# Altium PCB TAUV-Powerboard.PcbDoc (part 1 of 2)
Units mil, origin at the board's own origin, x right, y up, seen from the top; angles counter-clockwise.
Board outline 4762.5 x 3417.5 mil, 4 copper layers (Component Side, Ground Plane, Power Plane, Solder Side), stack 33.234 mil thick; 159 components, 82 nets, 454 pads, 262 vias.
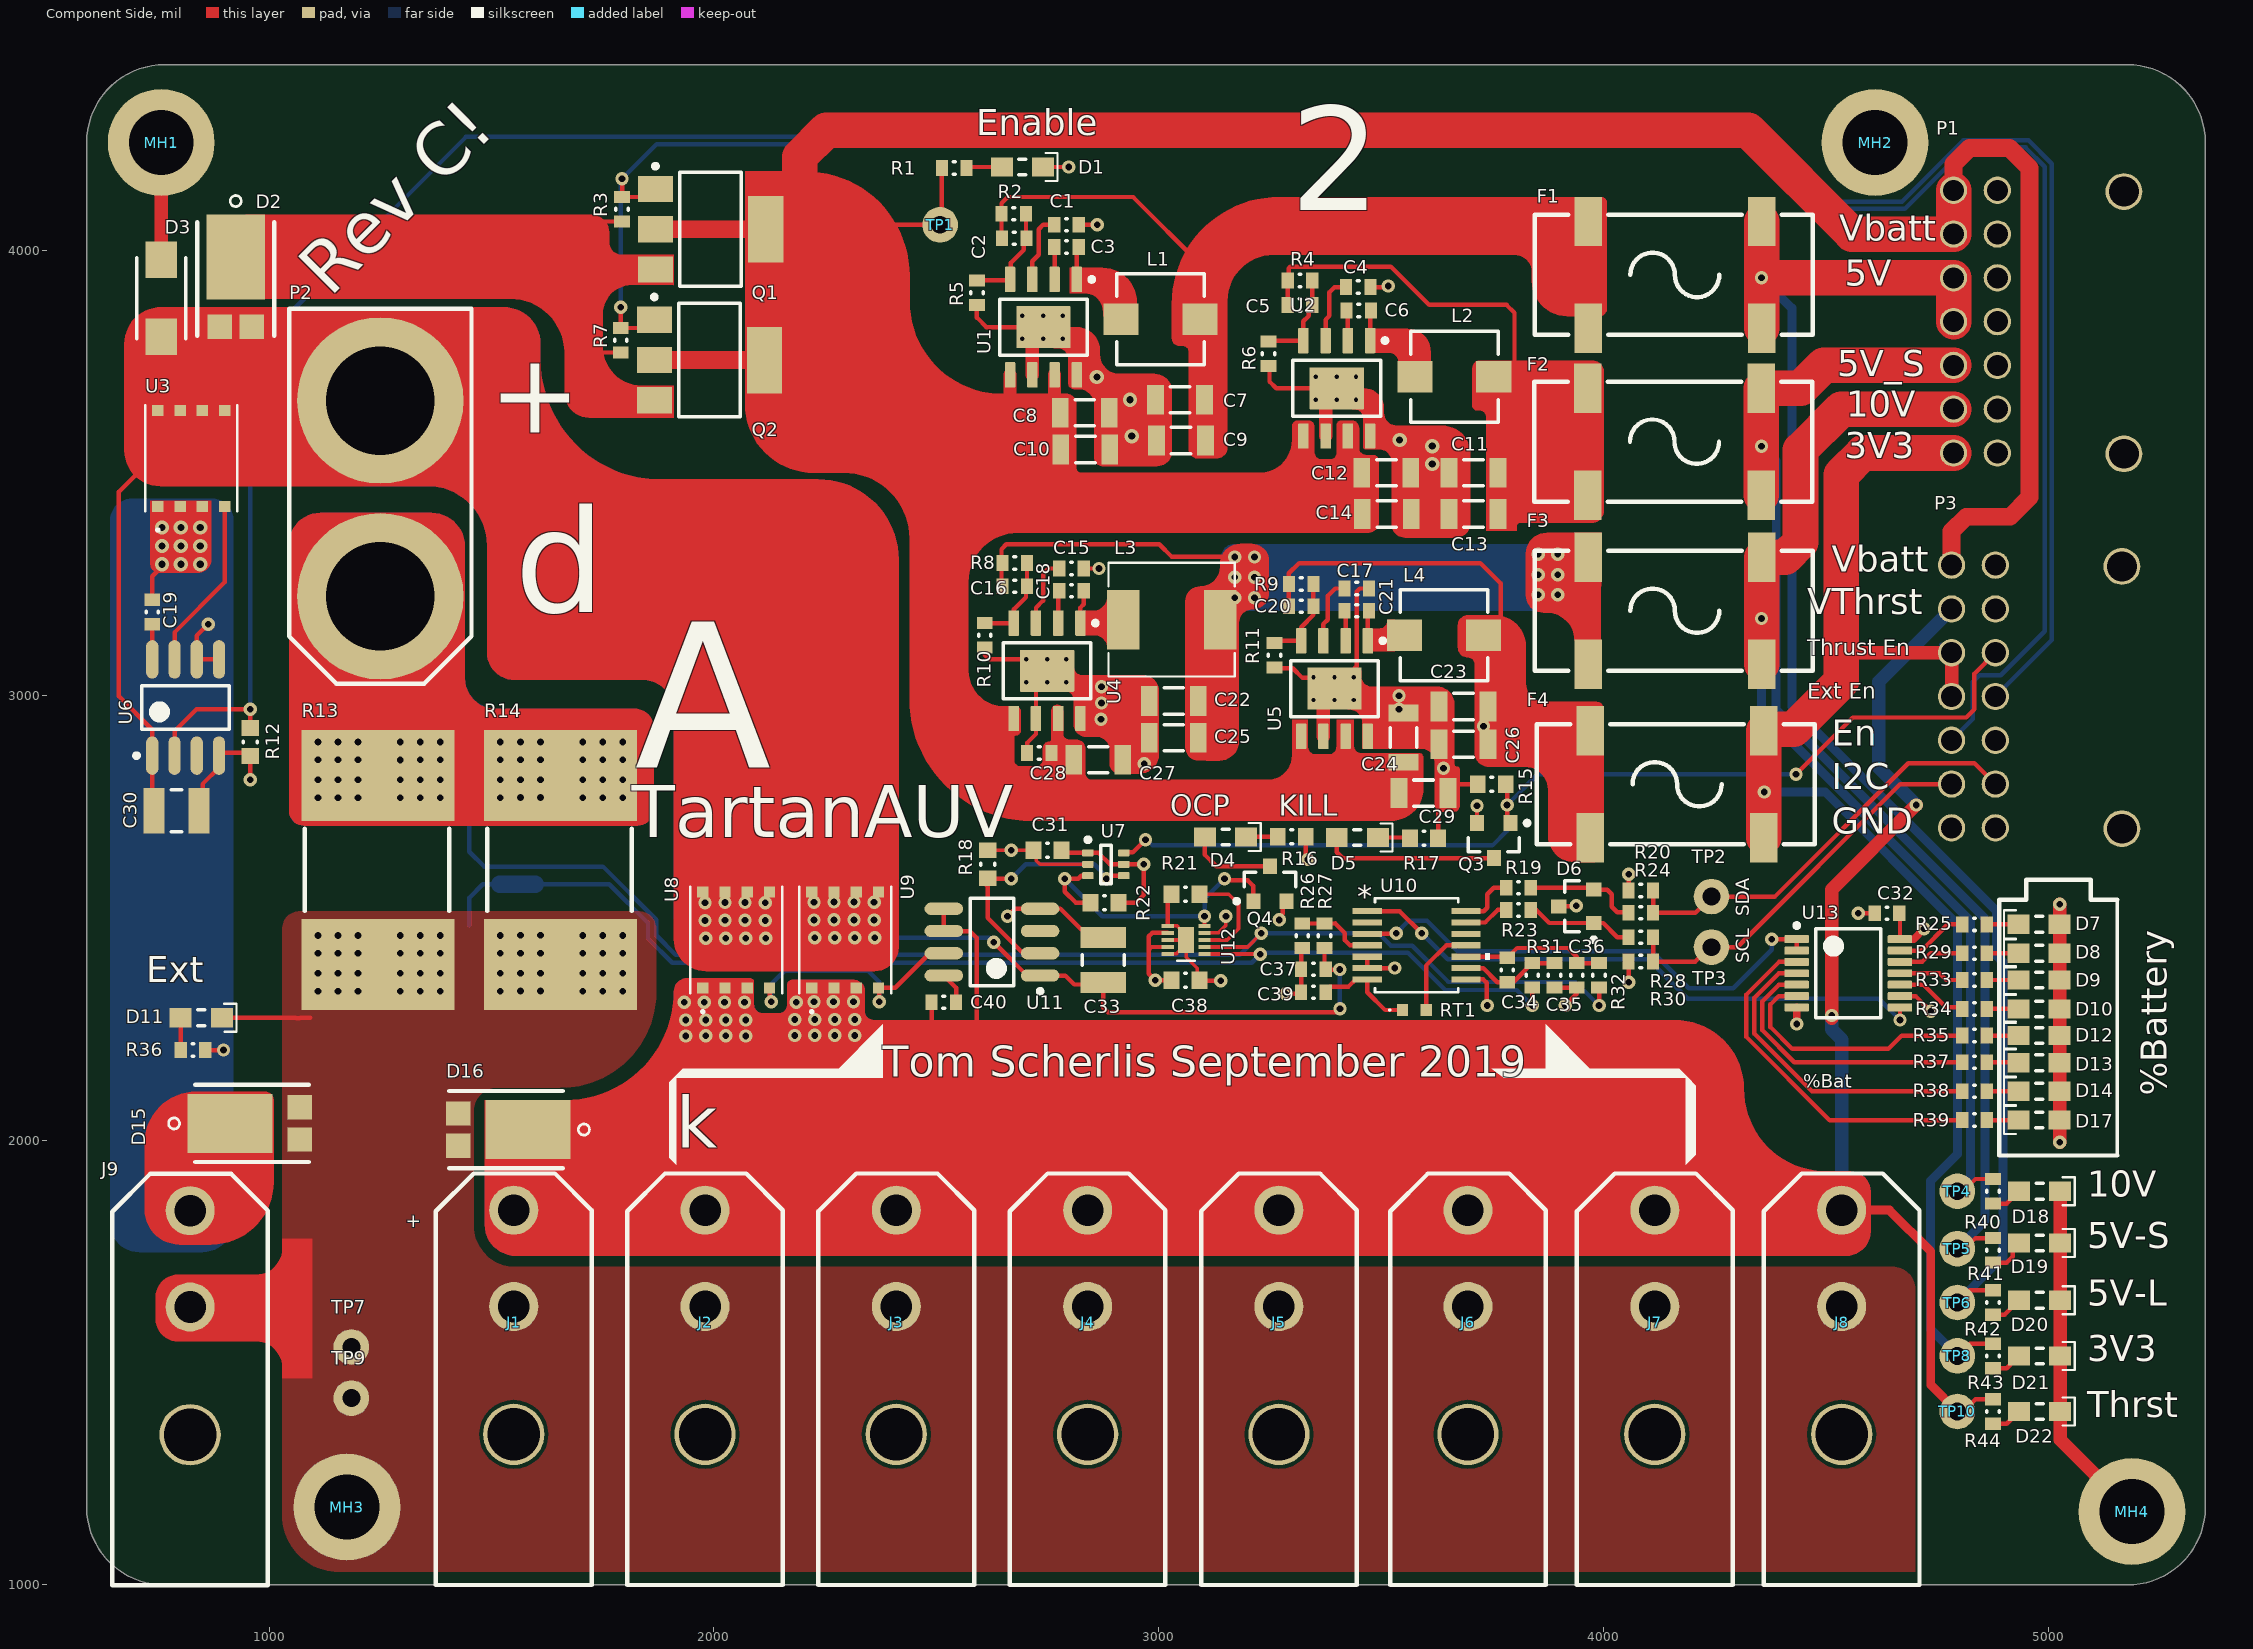
[diagram p0: Component Side view]
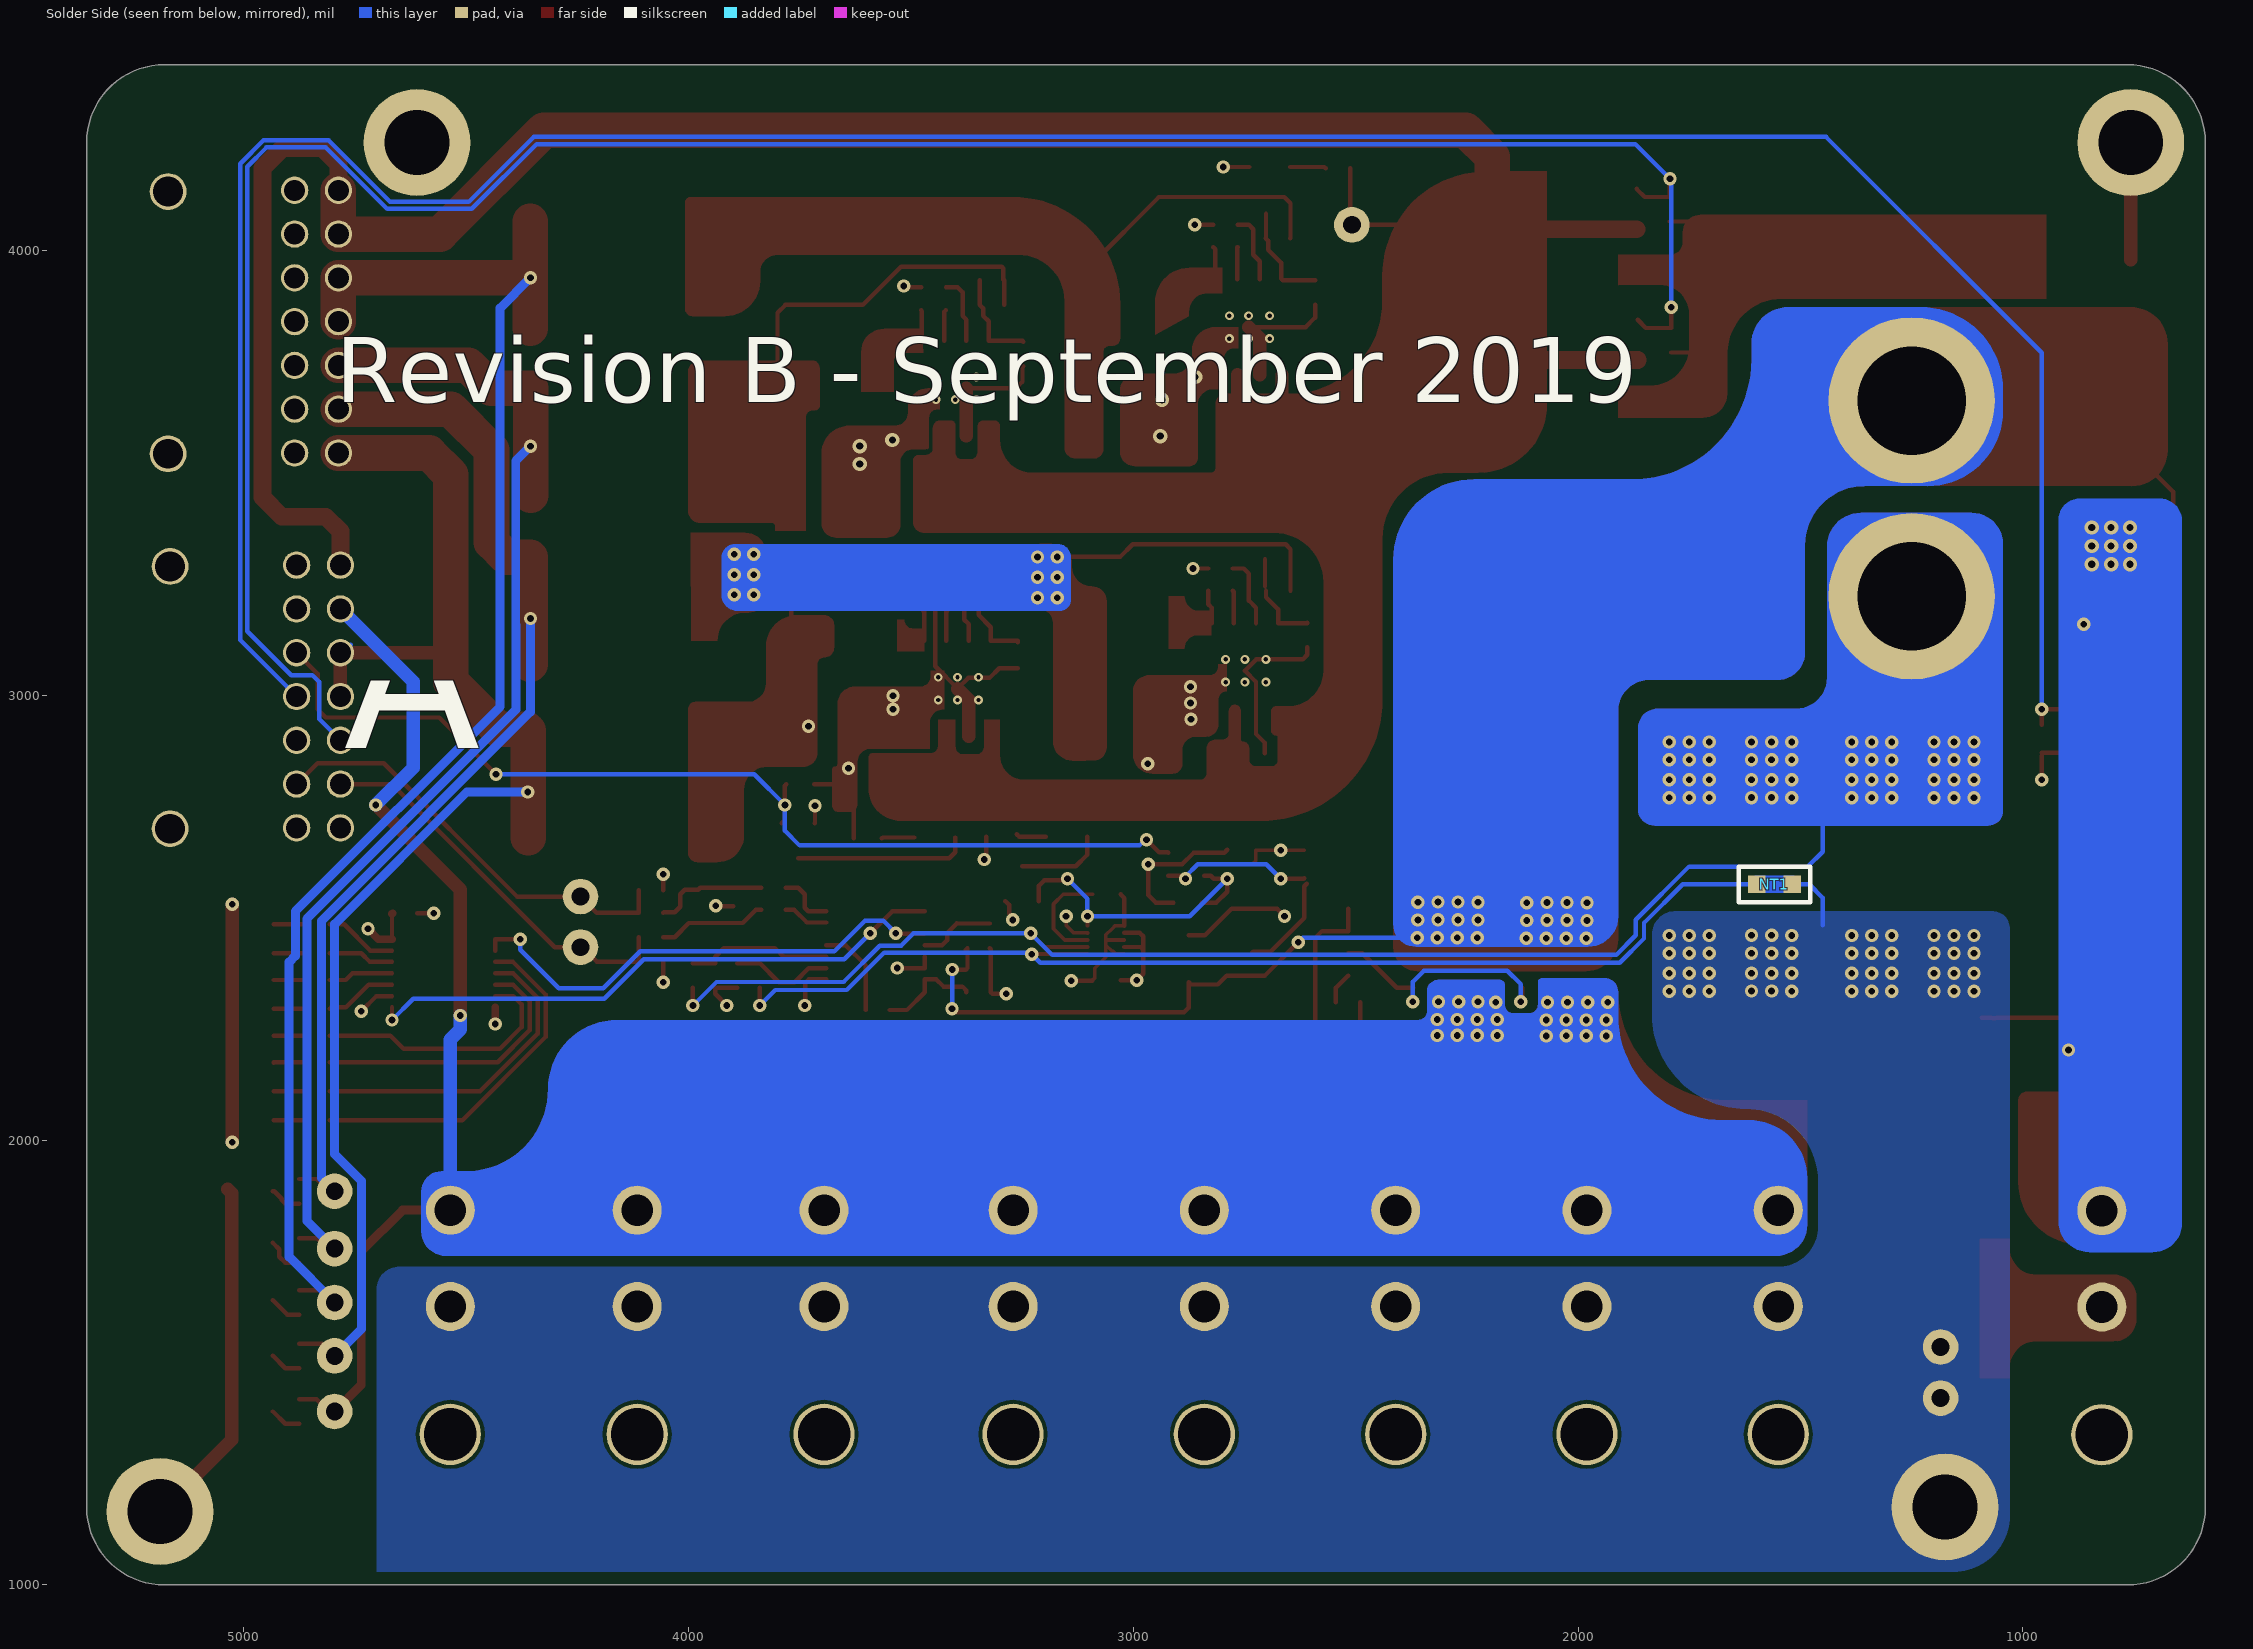
[diagram p1: Solder Side view, seen from below]
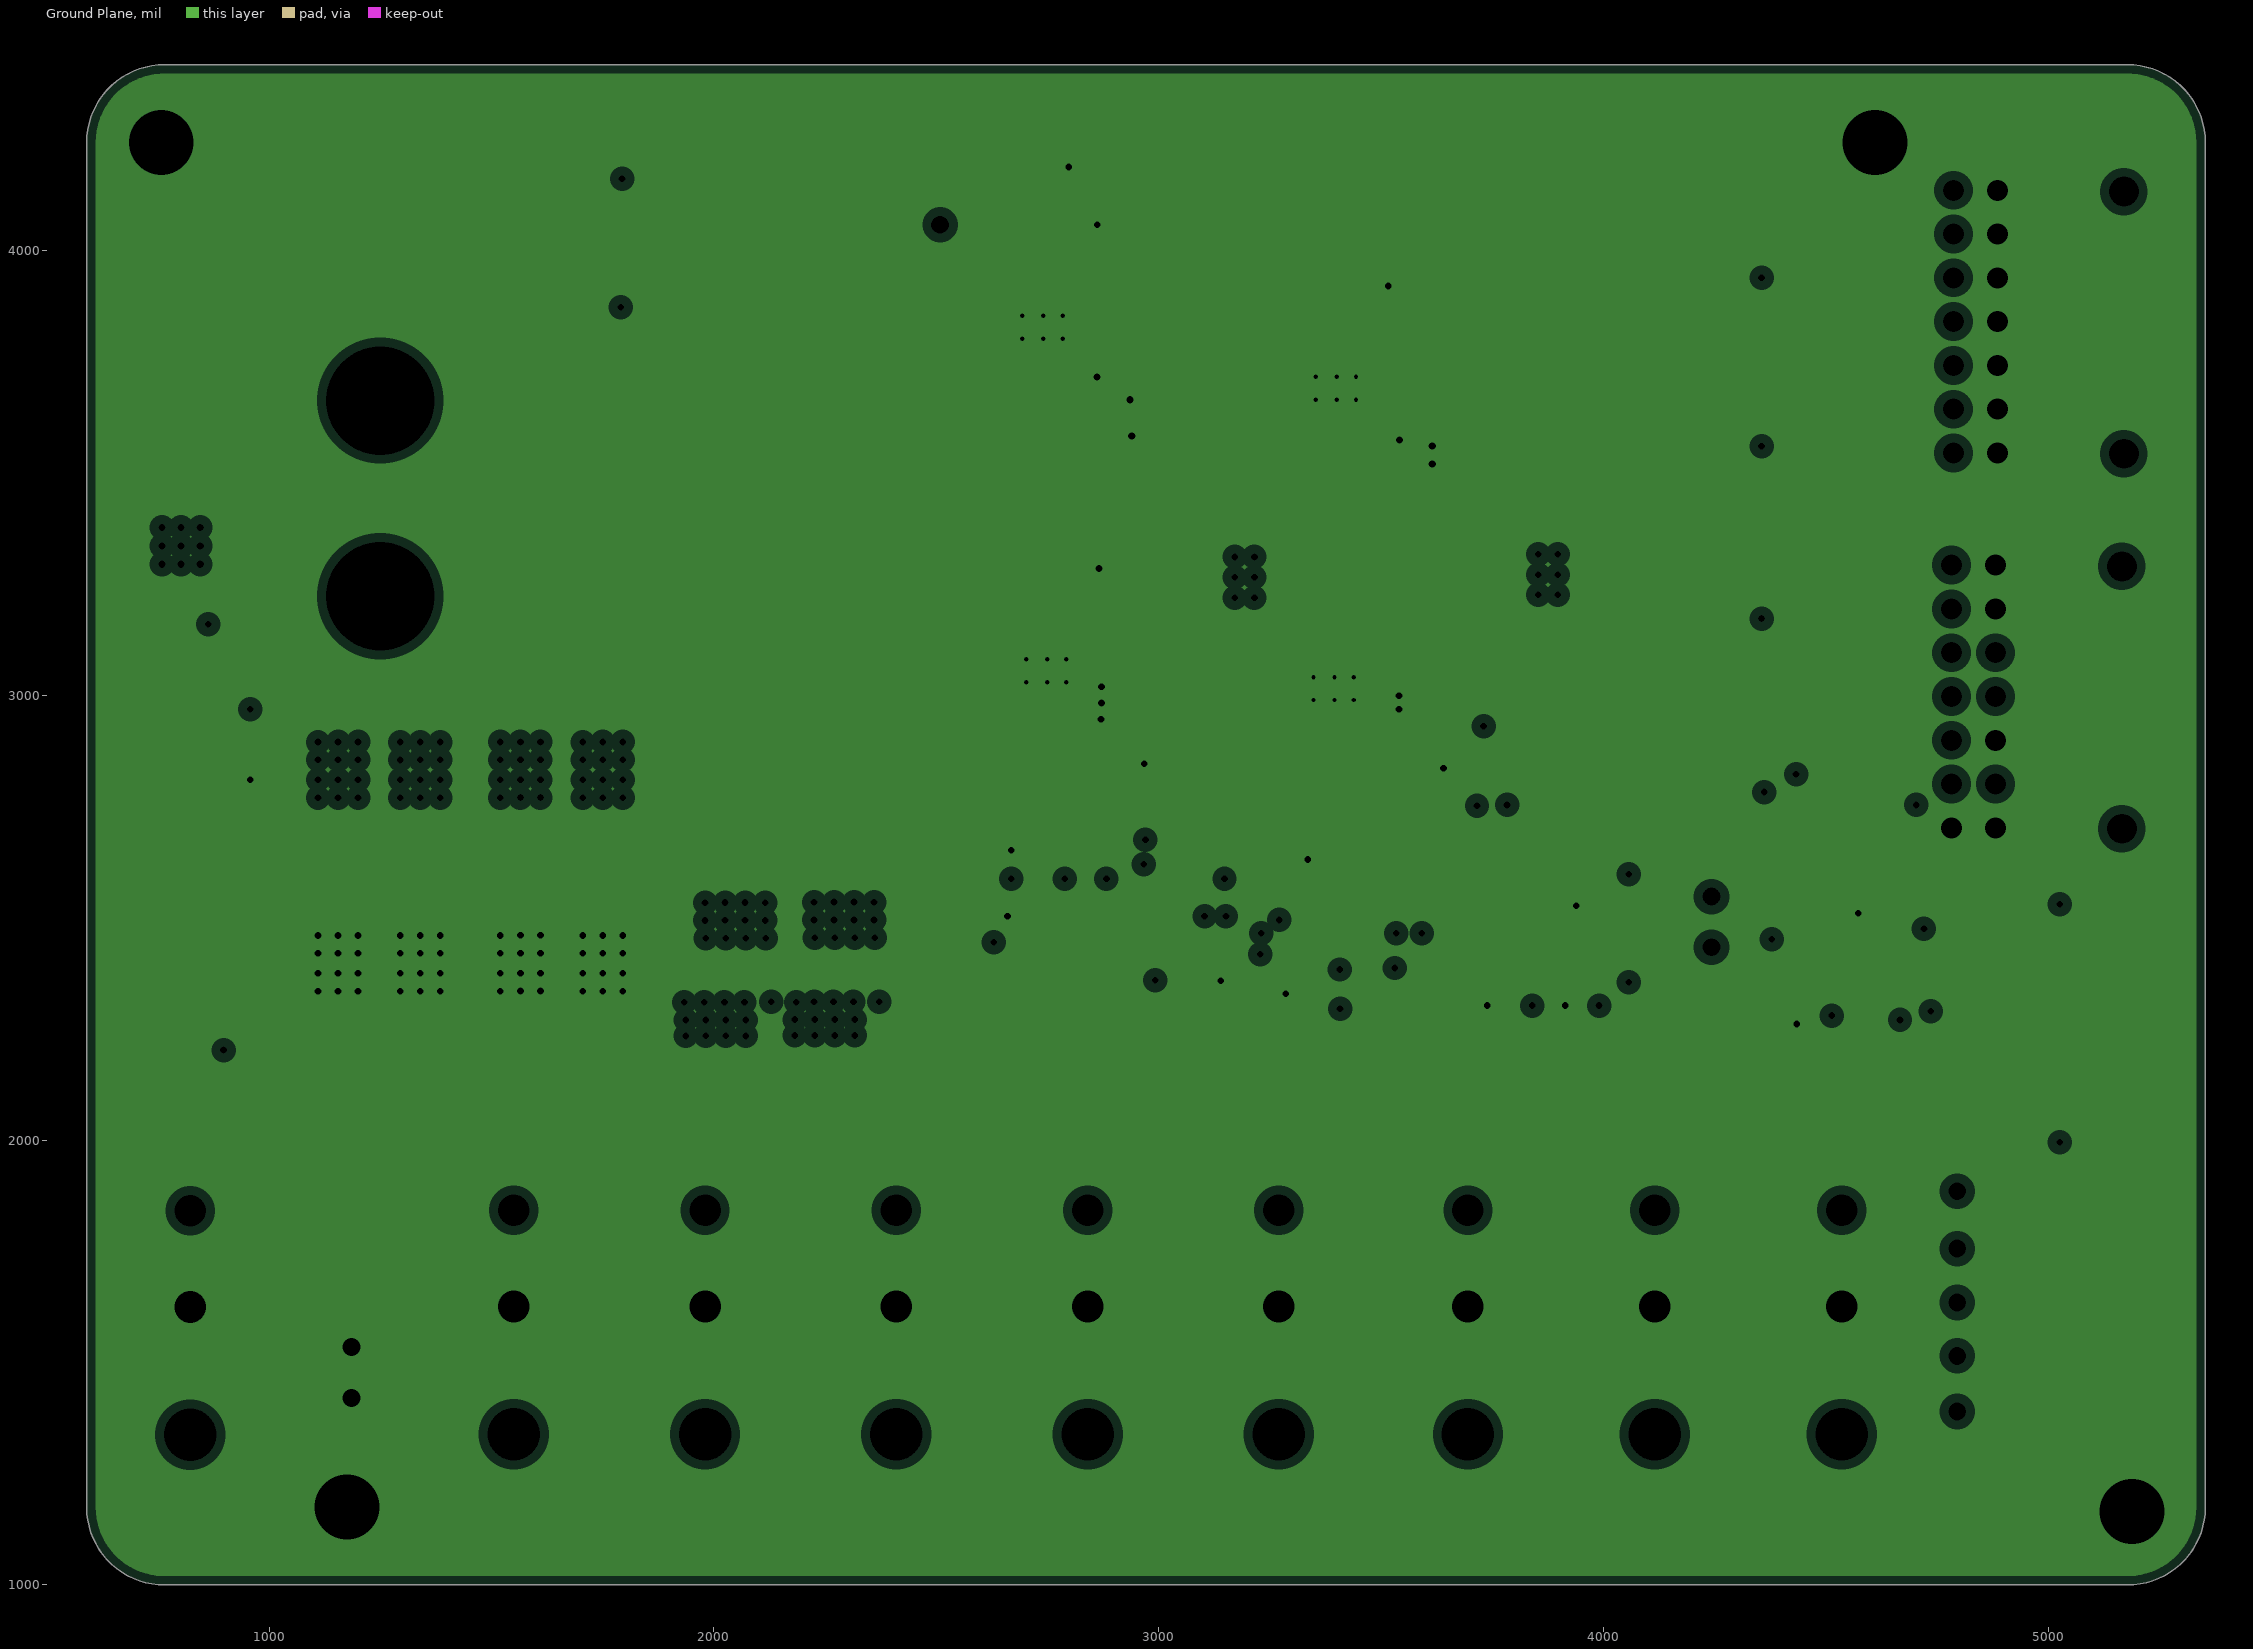
[diagram p2: Ground Plane, clearances drawn from the general rule]
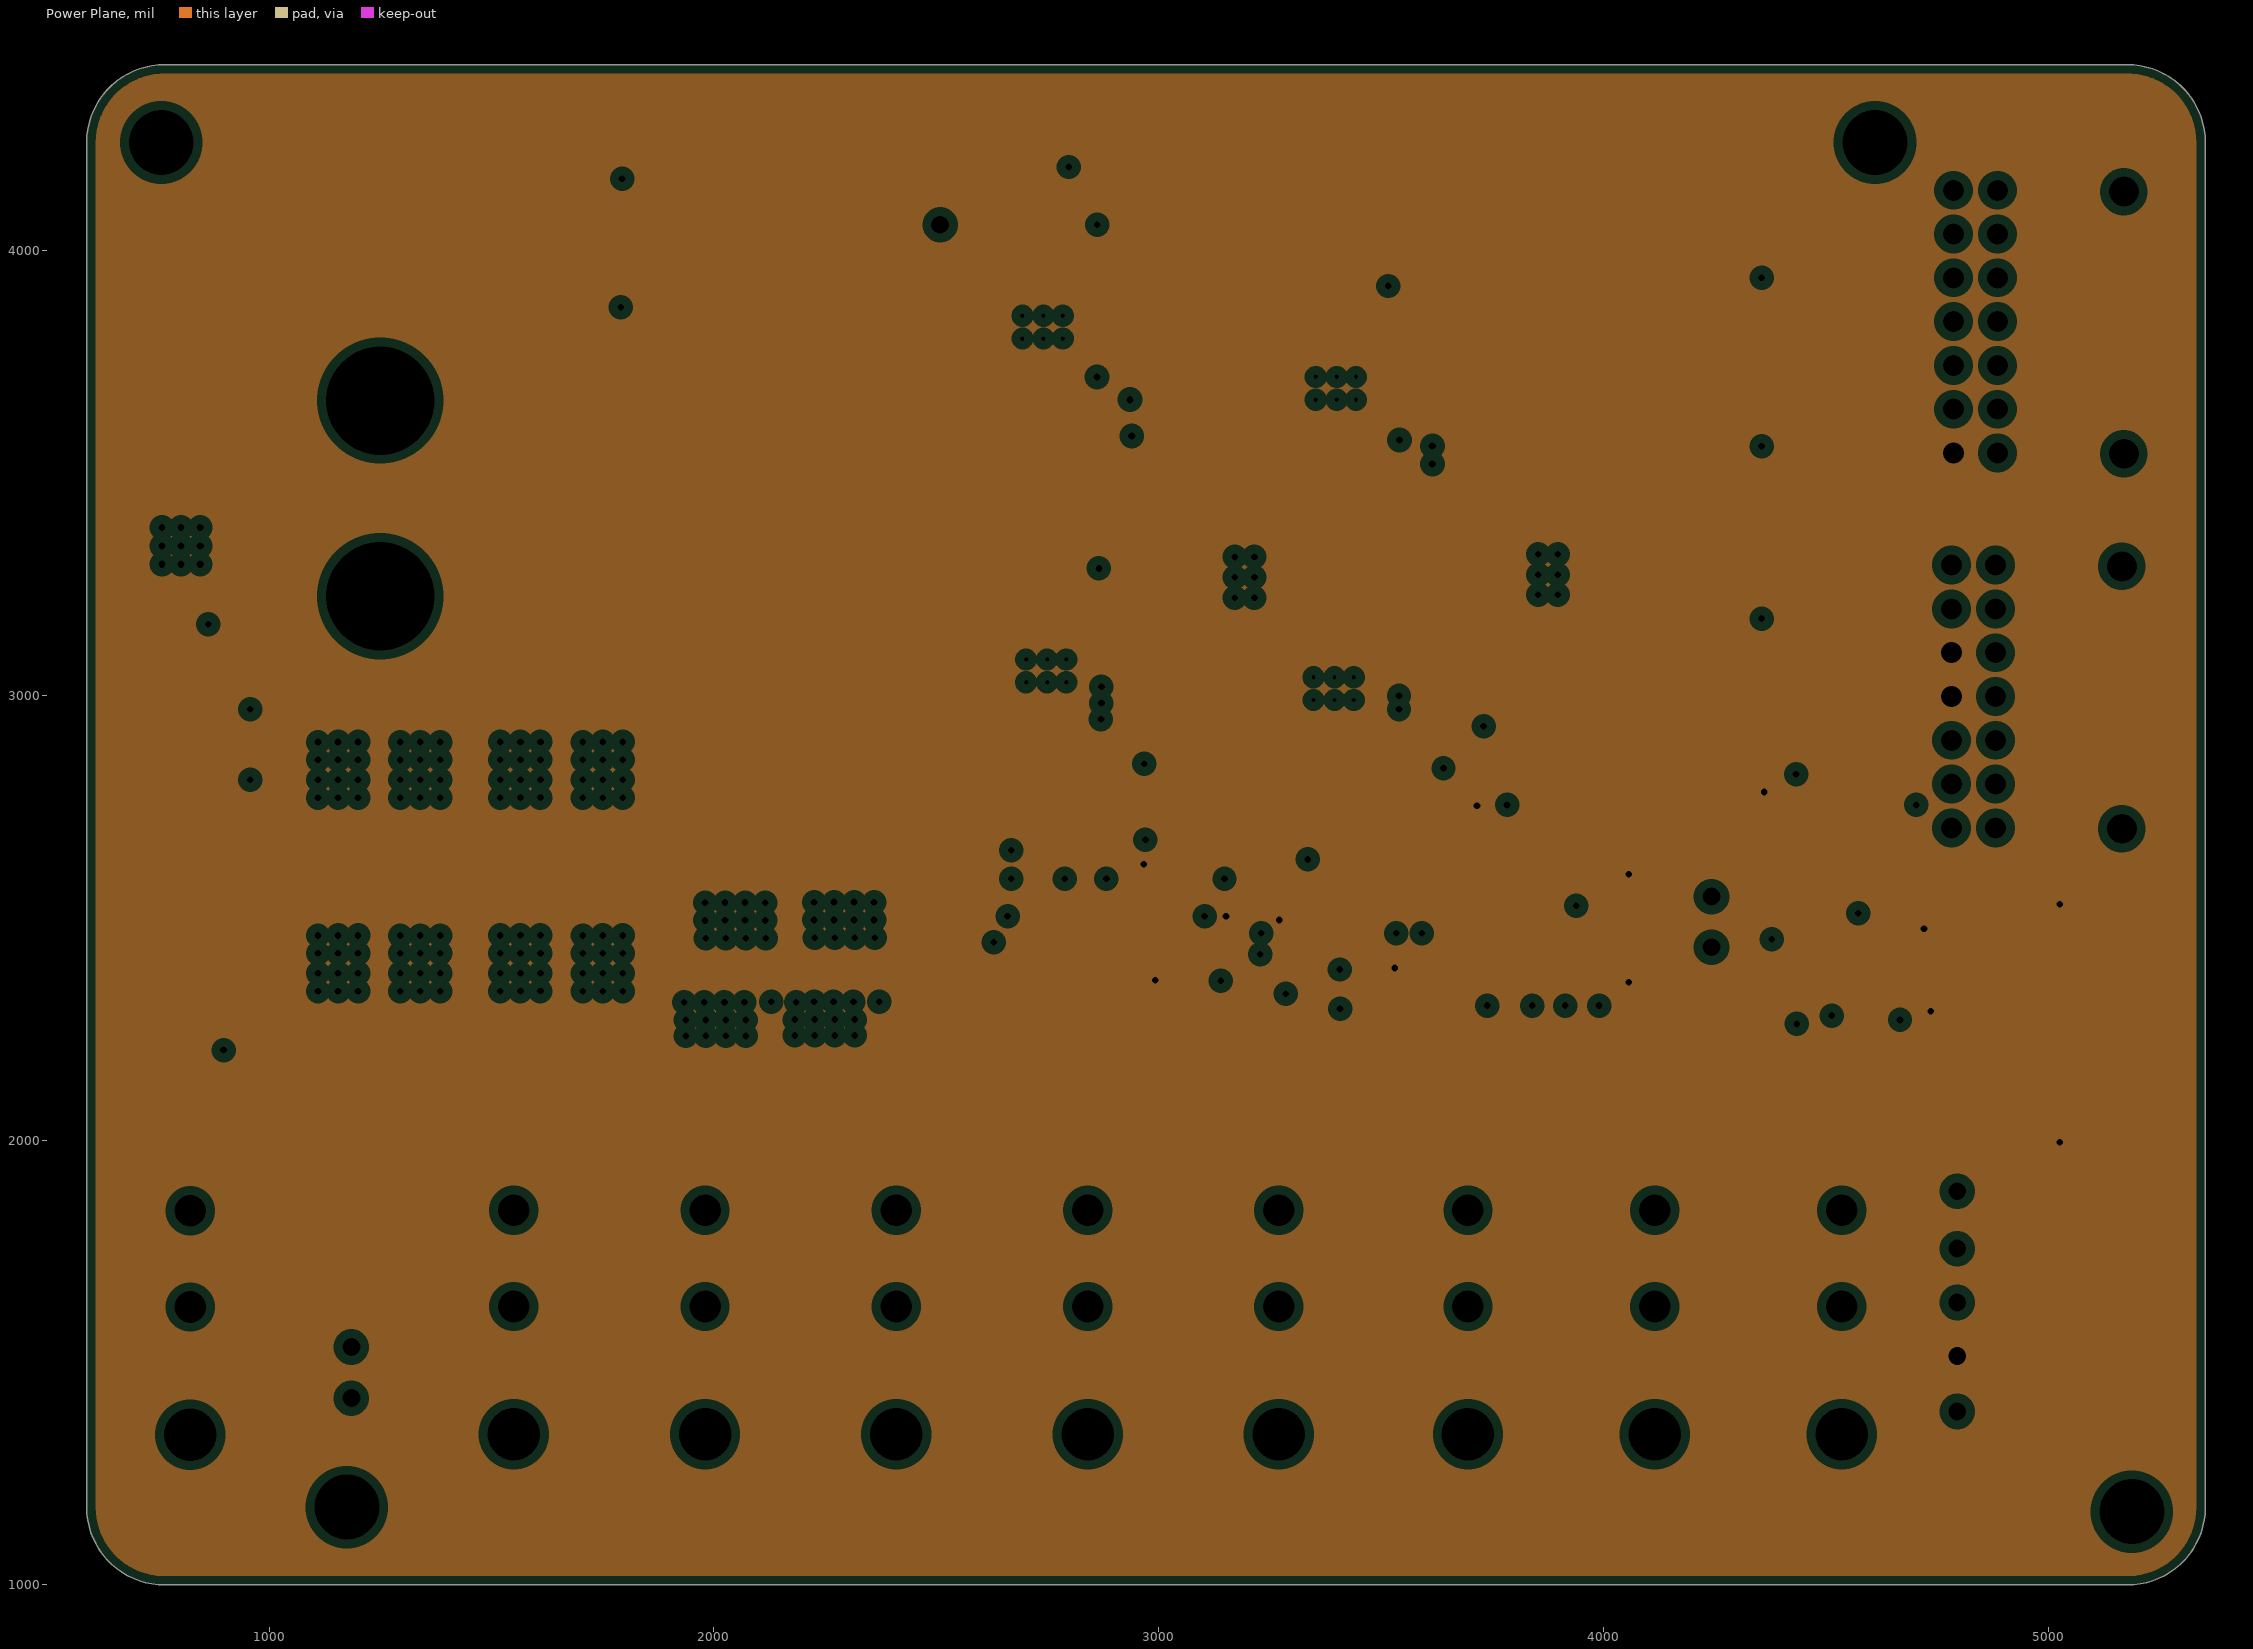
[diagram p3: Power Plane, clearances drawn from the general rule]

## Layer stack, top to bottom
Top Solder: solder mask 0.4, Solder Resist, Dk 3.5
Component Side: signal copper 1.4
Dielectric 1: core 12.6, FR-4, Dk 4.8
Ground Plane: plane copper 1.417, net GND
Dielectric 3: prepreg 5, Dk 4.2
Power Plane: plane copper 1.417, net VCC_3V3
Dielectric 4: core 10, Dk 4.2
Solder Side: signal copper 1.4
Bottom Solder: solder mask 0.4, Solder Resist, Dk 3.5

## Board outline
765,1000 5177.5,1000 ccw(c5177.5,1175) 5352.5,1175 5352.5,4242.5 ccw(c5177.5,4242.5) 5177.5,4417.5 765,4417.5 ccw(c765,4242.5) 590,4242.5 590,1175 ccw(c765,1175)

## Design rules (kind name [scope] priority, off if disabled: settings)
Clearance [All] p1: gap=8 ignorepadtopadclearanceinfootprint=FALSE except(6: Arc-Arc Arc-Track Arc-SMDPad Track-Track Track-SMDPad SMDPad-SMDPad)
Height [All] p1: minheight=0 maxheight=10000 prefheight=500
HoleSize [All] p1: absolutevalues=TRUE maxlimit=400 minlimit=10 maxpercent=80.000 minpercent=20.000
PlaneClearance [All] p1: clearance=20
PlaneConnect [All] p1: planeconnectstyle=Relief reliefexpansion=10 reliefentries=4 reliefconductorwidth=30 reliefairgap=6
PolygonConnect PolygonConnect_1 [InNet('GND')] p1: connectstyle=Direct reliefconductorwidth=50 reliefentries=4 polygonreliefangle="90 Angle" airgapwidth=10
PolygonConnect [All] p2: connectstyle=Relief reliefconductorwidth=10 reliefentries=4 polygonreliefangle="90 Angle" airgapwidth=10
RoutingVias [All] p1: holewidth=15 width=30 viastyle="Through Hole" minholewidth=15 minwidth=30 maxholewidth=28 maxwidth=50
SolderMaskExpansion [All] p1: expansion=4 istentingtop=FALSE
Width [All] p1: maxlimit=100 minlimit=8 preferedwidth=10
26 further rules are at their usual default settings.

## Classes and differential pairs
component class U_External: C19 C30 D15 J9 R12 U3 U6
component class U_Thrusters: *1 *2 *3 *4 *5 *6 *7 *8 C31 C33 C38 C40 D4 D5 D16 J1 J2 J3 J4 J5 J6 J7 J8 Q3 Q4 R15 R16 R17 R18 R21 R22 U7 U8 U9 U11 U12
component class U_Regulators: C1 C2 C3 C4 C5 C6 C7 C8 C9 C10 C11 C12 C13 C14 C15 C16 C17 C18 C20 C21 C22 C23 C24 C25 C26 C27 C28 C29 F1 F2 F3 F4 L1 L2 L3 L4 R2 R4 R5 R6 R8 R9 R10 R11 U1 U2 U4 U5
component class U_Power: D2 D3 NT1 P2 Q1 Q2 R3 R7 R13 R14
component class U_Interface: D1 D11 D18 D19 D20 D21 D22 MH1 MH2 MH3 MH4 P1 P3 R1 R36 R40 R41 R42 R43 R44 TP1 TP2 TP3 TP4 TP5 TP6 TP7 TP8 TP9 TP10
component class U_BMS: C32 C34 C35 C36 C37 C39 D6 D7 D8 D9 D10 D12 D13 D14 D17 R19 R20 R23 R24 R25 R26 R27 R28 R29 R30 R31 R32 R33 R34 R35 R37 R38 R39 RT1 U10 U13

## Components (designator, comment, footprint, x,y, rotation, side; value= is the part's Value field where it differs from the comment)
C1 "1uF 25V" CAPC0603(1608)100_L 2792.5,4057.5 r180 top value=1uF
C2 "30pF" CAPC0603(1608)100_L 2674.94,4027.5 r180 top
C3 "100nF" CAPC0603(1608)100_L 2792.5,4007.5 r180 top
C4 "1uF 25V" CAPC0603(1608)100_L 3448.42,3917.5 r180 top value=1uF
C5 "30pF" CAPC0603(1608)100_L 3317.5,3877.44 r180 top
C6 "100nF" CAPC0603(1608)100_L 3449.36,3865 r180 top
C7 "4.7uF" CAPC1206(3216)190_L 3047.72,3664.41 r0 top
C8 "4.7uF" CAPC1206(3216)190_L 2833.44,3635 r180 top
C9 "47uF" CAPC1206(3216)190_L 3050,3572.5 r0 top
C10 "4.7uF" CAPC1206(3216)190_L 2835,3552.5 r180 top
C11 "47uF" CAPC1206(3216)190_L 3707.47,3500 r0 top
C12 "4.7uF" CAPC1206(3216)190_L 3511.63,3500 r180 top
C13 "4.7uF" CAPC1206(3216)190_L 3707.47,3407.5 r0 top
C14 "4.7uF" CAPC1206(3216)190_L 3512.38,3407.5 r180 top
C15 "1uF 25V" CAPC0603(1608)100_L 2803.94,3285 r180 top value=1uF
C16 "12pF" CAPC0603(1608)100_L 2676.22,3245.21 r180 top
C17 "1uF 25V" CAPC0603(1608)100_L 3445,3240 r180 top value=1uF
C18 "680nF" CAPC0603(1608)100_L 2803.94,3235 r180 top
C19 "10nF" CAPC0603(1608)100_L 737.5,3187.44 r90 top
C20 "75pF" CAPC0603(1608)100_L 3320,3200 r180 top
C21 "100nF" CAPC0603(1608)100_L 3445,3190 r180 top
C22 "4.7uF" CAPC1206(3216)190_L 3033.73,2986.98 r0 top
C23 "4.7uF" CAPC1206(3216)190_L 3685,2975 r0 top
C24 "4.7uF" CAPC1206(3216)190_L 3550,2904.88 r270 top
C25 "CAP 22uF 16V 1206(3216)" CAPC1206(3216)190_L 3033.73,2904.48 r0 top value=22uF
C26 "47uF" CAPC1206(3216)190_L 3684.88,2890 r0 top
C27 "10uF" CAPC1206(3216)190_L 2863.94,2855 r180 top
C28 "100nF" CAPC0603(1608)100_L 2731.38,2870 r0 top
C29 "4.7uF" CAPC1206(3216)190_L 3595,2780 r180 top
C30 "CAP 22uF 25V 1210(3225)" CAPC1210(3225)220_L 791.84,2740 r180 top value=22uF
C31 "100nF" CAPC0603(1608)100_N 2749.75,2651.57 r0 top
C32 "100nF" CAPC0603(1608)100_L 4637.02,2510 r0 top
C33 "CAP 22uF 25V 1210(3225)" CAPC1210(3225)220_L 2875,2405 r270 top value=22uF
C34 "100nF" CAPC0603(1608)100_L 3783.51,2382.5 r270 top
C35 "100nF" CAPC0603(1608)100_L 3889.73,2370.53 r90 top
C36 "100nF" CAPC0603(1608)100_L 3939.73,2370.53 r90 top
C37 "1uF 25V" CAPC0603(1608)100_L 3347.5,2384.38 r0 top value=1uF
C38 "100nF" CAPC0603(1608)100_N 3060,2359.24 r180 top
C39 "1uF 25V" CAPC0603(1608)100_L 3347.5,2332.41 r0 top value=1uF
C40 "10nF" CAPC0603(1608)100_L 2516.73,2310 r180 top
D1 "LED GREEN" LED_0805 2693.38,4187.5 r180 top
D2 "SBRT15U50SP5-13" SBRT15U50SP5-13 925,3985 r0 top
D3 "SMAJ30CA" LFUS-DO-214AC-A-2_V 757.5,3892.5 r90 top
D4 "LED RED" LED_0805 3150.02,2681.58 r180 top
D5 "LED RED" LED_0805 3446.37,2680.23 r180 top
D6 "MMBZ5V6ALT1G" ONSC-SOT-23-3-318-08_V 3938.51,2525.5 r180 top
D7 "LED GREEN" LED_0805 4978.74,2485 r0 top
D8 "LED GREEN" LED_0805 4978.74,2420 r0 top
D9 "LED GREEN" LED_0805 4978.74,2360 r0 top
D10 "LED YELLOW" LED_0805 4978.74,2295 r0 top
D11 "LED GREEN" LED_0805 847.5,2275 r180 top
D12 "LED YELLOW" LED_0805 4978.74,2235 r0 top
D13 "LED YELLOW" LED_0805 4978.74,2174.02 r0 top
D14 "LED RED" LED_0805 4978.74,2110 r0 top
D15 "SBRT15U50SP5-13" SBRT15U50SP5-13 912.5,2037.5 r90 top
D16 "SBRT15U50SP5-13" SBRT15U50SP5-13 1581.77,2023.78 r270 top
D17 "LED RED" LED_0805 4978.74,2045 r0 top
D18 "LED GREEN" LED_0805 4980,1885 r180 top
D19 "LED GREEN" LED_0805 4980,1768.95 r180 top
D20 "LED GREEN" LED_0805 4980,1640 r180 top
D21 "LED GREEN" LED_0805 4980,1515 r180 top
D22 "LED GREEN" LED_0805 4980,1390 r180 top
F1 "Fuse Holder 3588" "Fuse Holder 3588" 4160,3945 r0 top
F2 "Fuse Holder 3588" "Fuse Holder 3588" 4159.25,3570 r0 top
F3 "Fuse Holder 3588" "Fuse Holder 3588" 4160,3190 r0 top
F4 "Fuse Holder 3588" "Fuse Holder 3588" 4165,2800 r0 top
J1 "2-pin megafit" "2-PIN MEGAFIT RA" 1550,1000 r0 top
J2 "2-pin megafit" "2-PIN MEGAFIT RA" 1980,1000 r0 top
J3 "2-pin megafit" "2-PIN MEGAFIT RA" 2410,1000 r0 top
J4 "2-pin megafit" "2-PIN MEGAFIT RA" 2840,1000 r0 top
J5 "2-pin megafit" "2-PIN MEGAFIT RA" 3270,1000 r0 top
J6 "2-pin megafit" "2-PIN MEGAFIT RA" 3695,1000 r0 top
J7 "2-pin megafit" "2-PIN MEGAFIT RA" 4115,1000 r0 top
J8 "2-pin megafit" "2-PIN MEGAFIT RA" 4535,1000 r0 top
J9 "2-pin megafit" "2-PIN MEGAFIT RA" 822.5,998.92 r0 top
L1 "SRP6540-8R2M" "BOURNS SRP5030T" 3003.91,3845.59 r0 top
L2 "SRP6540-8R2M" "BOURNS SRP5030T" 3664.37,3715.59 r0 top
L3 "SRP6540-100M" IND_SRP6540-100M 3028.94,3170 r0 top
L4 "6.8uH" "BOURNS SRP5030T" 3641.42,3135 r0 top
MH1 "#4-40" "MOUNTING HOLE #4-40" 757.5,4242.5 r0 top
MH2 "#4-40" "MOUNTING HOLE #4-40" 4610,4242.5 r0 top
MH3 "#4-40" "MOUNTING HOLE #4-40" 1175,1175 r0 top
MH4 "#4-40" "MOUNTING HOLE #4-40" 5187.5,1165 r0 top
NT1 "Net Tie" Net_Tie_80mil 1518.56,2575 r0 bottom net-tie
P1 "14-Pin 2-Row Nano-Fit Right Angle" "MOLEX NANO-FIT 2X7 - Right Angle" 4885,3544.64 r90 top
P2 "XT90" XT90 1250,3222.5 r90 top
P3 "14-Pin 2-Row Nano-Fit Right Angle" "MOLEX NANO-FIT 2X7 - Right Angle" 4880.55,2701.97 r90 top
Q1 "NVF6P02T3G" ONSC-SOT-223-4-318E-04_V 1992.5,4047.66 r0 top
Q2 "NVF6P02T3G" ONSC-SOT-223-4-318E-04_V 1990,3753.49 r0 top
Q3 "NVTR01P02LT1G" ONSC-SOT-23-3-318-08_V 3753.11,2673.29 r270 top
Q4 "NVTR01P02LT1G" ONSC-SOT-23-3-318-08_V 3249.87,2576.5 r90 top
R1 "1K2" RESC0603(1608)_L 2540,4185 r180 top value="1200.00 Ohm"
R2 "88K7 1%" RESC0603(1608)_L 2673.94,4082.5 r180 top value="88700.00 Ohm"
R3 "4K7" RESC0603(1608)_L 1793.42,4092.5 r270 top value="4700.00 Ohm"
R4 "88K7 1%" RESC0603(1608)_L 3317.5,3932.56 r180 top value="88700.00 Ohm"
R5 "22K1 1%" RESC0603(1608)_L 2591.13,3905 r90 top value="22100.00 Ohm"
R6 "22K1 1%" RESC0603(1608)_L 3246.76,3767.56 r90 top value="22100.00 Ohm"
R7 "4K7" RESC0603(1608)_L 1790.57,3798.04 r270 top value="4700.00 Ohm"
R8 "200K 1%" RESC0603(1608)_L 2676.22,3297.49 r180 top value="200000.00 Ohm"
R9 "51K 1%" RESC0603(1608)_L 3320,3250 r180 top value="51000.00 Ohm"
R10 "22K1 1%" RESC0603(1608)_L 2608.75,3135 r90 top value="22100.00 Ohm"
R11 "22K1 1%" RESC0603(1608)_L 3260,3090 r90 top value="22100.00 Ohm"
R12 "10K" RESC0603(1608)_N 957.5,2895 r270 top value="10000.00 Ohm"
R13 "WSLP59312 2mR 8W" WSLP59312L000FEA 1245,2820 r270 top
R14 "WSLP59312 2mR 8W" WSLP59312L000FEA 1655,2820 r270 top
R15 "10K" RESC0603(1608)_N 3748.33,2800 r180 top value="10000.00 Ohm"
R16 "100R" RESC0603(1608)_N 3298.93,2681.58 r0 top value="100.00 Ohm"
R17 "100R" RESC0603(1608)_N 3596.43,2678.63 r0 top value="100.00 Ohm"
R18 "10K" RESC0603(1608)_N 2615.5,2620.07 r90 top value="10000.00 Ohm"
R19 "100R" RESC0603(1608)_L 3808.51,2567.5 r0 top value="100.00 Ohm"
R20 "4K7" RESC0603(1608)_L 4083.51,2561.28 r180 top value="4700.00 Ohm"
R21 "7K5 1%" RESC0603(1608)_N 3060,2552.5 r180 top value="7500.00 Ohm"
R22 "10K" RESC0603(1608)_N 2877.94,2533.95 r0 top value="10000.00 Ohm"
R23 "100R" RESC0603(1608)_L 3808.51,2517.5 r0 top value="100.00 Ohm"
R24 "100R" RESC0603(1608)_L 4083.51,2511.28 r0 top value="100.00 Ohm"
R25 "100R" RESC0603(1608)_L 4833.74,2485 r0 top value="100.00 Ohm"
R26 "16K5" RESC0603(1608)_L 3322.5,2459.38 r90 top value="16500.00 Ohm"
R27 "294K" RESC0603(1608)_L 3372.5,2459.38 r270 top value="294000.00 Ohm"
R28 "100R" RESC0603(1608)_L 4083.51,2456.28 r0 top value="100.00 Ohm"
R29 "100R" RESC0603(1608)_L 4833.74,2420 r0 top value="100.00 Ohm"
R30 "4K7" RESC0603(1608)_L 4083.51,2401.28 r180 top value="4700.00 Ohm"
R31 "100R 1%" RESC0603(1608)_L 3839.73,2370.53 r90 top value="100.00 Ohm"
R32 "100R 1%" RESC0603(1608)_L 3989.73,2370.53 r90 top value="100.00 Ohm"
R33 "100R" RESC0603(1608)_L 4833.74,2360 r0 top value="100.00 Ohm"
R34 "100R" RESC0603(1608)_L 4833.74,2295 r0 top value="100.00 Ohm"
R35 "100R" RESC0603(1608)_L 4833.74,2235 r0 top value="100.00 Ohm"
R36 "1K2" RESC0603(1608)_L 828.75,2202.5 r0 top value="1200.00 Ohm"
R37 "100R" RESC0603(1608)_L 4833.74,2175 r0 top value="100.00 Ohm"
R38 "100R" RESC0603(1608)_L 4833.74,2110 r0 top value="100.00 Ohm"
R39 "100R" RESC0603(1608)_L 4833.74,2045 r0 top value="100.00 Ohm"
R40 "470R" RESC0603(1608)_L 4875,1885 r90 top value="470.00 Ohm"
R41 "220R" RESC0603(1608)_L 4875,1752.28 r90 top value="220.00 Ohm"
R42 "220R" RESC0603(1608)_L 4875,1635 r90 top value="220.00 Ohm"
R43 "100R" RESC0603(1608)_L 4875,1515 r90 top value="100.00 Ohm"
R44 "1K2" RESC0603(1608)_L 4875,1390 r90 top value="1200.00 Ohm"
RT1 "NCP18XH103F03RB" MURA-NCP18XH103F03RB-2_V 3574.31,2292.5 r0 top
TP1 "Test Point Loop" "Test Point Loop - Black" 2508.5,4057.5 r270 top
TP2 "Test Point Loop" "Test Point Loop - Black" 4242.5,2547.5 r0 top
TP3 "Test Point Loop" "Test Point Loop - Black" 4242.5,2433.78 r0 top
TP4 "Test Point Loop" "Test Point Loop - Black" 4795,1885 r0 top
TP5 "Test Point Loop" "Test Point Loop - Black" 4795,1756.11 r0 top
TP6 "Test Point Loop" "Test Point Loop - Black" 4795,1635 r0 top
TP7 "Test Point Loop" "Test Point Loop - Black" 1185,1535 r90 top
TP8 "Test Point Loop" "Test Point Loop - Black" 4795,1515 r0 top
TP9 "Test Point Loop" "Test Point Loop - Black" 1185,1420 r90 top
TP10 "Test Point Loop" "Test Point Loop - Black" 4795,1390 r0 top
U1 "LMR23630-Q1" DDA0008E_N 2740.63,3827.5 r270 top
U2 "LMR23630-Q1" DDA0008E_N 3400,3690 r270 top
U3 "Part Number: CSD18563Q5A" DQJ8 825,3532.5 r90 top value=Value
U4 "LMR23630-Q1" DDA0008E_N 2748.94,3055 r270 top
U5 "LMR23630-Q1" DDA0008E_N 3395,3015 r270 top
U6 "MIC5021YM" MICL-SOICN-8LD-PL-1_V 812.5,2972.5 r90 top
U7 "SN74LVC1G97QDCKRQ1" DCK0006A_L 2881.02,2620.07 r0 top
U8 "Part Number: CSD18563Q5A" DQJ8 2050,2450 r90 top value=Value
U9 "Part Number: CSD18563Q5A" DQJ8 2295,2450 r90 top value=Value
U10 "BQ34Z100PWR-G1" PW14 3579.51,2438 r0 top value=Value
U11 "MIC5021YM" MICL-SOICN-8LD-PL-1_V 2625,2445 r180 top
U12 "Part Number: INA300AIDSQT" DSQ10_P9X1P5 3061.48,2449.91 r180 top value=Value
U13 "SN74HC164PW" PW0014A_N 4550,2375 r0 top

## Footprints (in the part's own frame and the unit in brackets; to place one, negate y for a bottom-side part, rotate by r counter-clockwise, add the part's x,y. Pads: shape width x height; smd on the part's side, far side on the other; paste and mask are expansions set on the pad)
"2-PIN MEGAFIT RA" [mm]
  round 2.8 hole 1.8: 1(0,15.9) 2(0,21.4)
  round 3.5 hole 3: ""(0,8.6)
  silkscreen extent -4.44,0 4.44,23.49, body extent -4.16,-24.98 4.19,21.9, height 16.75
"BOURNS SRP5030T" [mm] "Precision Wire Wound Inductor, 2-Leads, Body 5.70x5.20mm, IPC Medium Density"
  rect 2x1.8 smd: 1(-2.25,0) 2(2.25,0)
  silkscreen extent -2.5,-2.6 2.5,2.6, body extent -2.85,-2.6 2.85,2.6, height 3
CAPC0603(1608)100_L [mm] "Chip Capacitor, Body 1.6x0.8mm, Height 1.0mm, IPC High Density"
  rect 0.7x0.9 smd: 1(-0.7,0) 2(0.7,0)
  silkscreen extent -0.05,-0.35 0.05,0.35, body extent -0.87,-0.47 0.88,0.48, height 1
CAPC0603(1608)100_N [mm] "Chip Capacitor, Body 1.6x0.8mm, Height 1.0mm, IPC Medium Density"
  rect 0.9x1 smd: 1(-0.8,0) 2(0.8,0)
  silkscreen extent -0.05,-0.4 0.05,0.4, body extent -0.87,-0.48 0.88,0.47, height 1
CAPC1206(3216)190_L [mm] "Chip Capacitor, Body 3.2x1.6mm, Height 1.9mm, IPC High Density"
  rect 0.95x1.7 smd: 1(-1.4,0) 2(1.4,0)
  silkscreen extent -0.55,-0.75 0.55,0.75, body extent -1.7,-0.9 1.7,0.9, height 1.9
CAPC1210(3225)220_L [mm] "Chip Capacitor, Body 3.2x2.5mm, Height 2.2mm, IPC High Density"
  rect 1.2x2.6 smd: 1(-1.275,0) 2(1.275,0)
  silkscreen extent -0.3,-1.2 0.3,1.2, body extent -1.7,-1.35 1.7,1.35, height 2.2
DCK0006A_L [mm] "SOT23, 6-Leads, Body 2.15x1.4mm, Pitch 0.65mm, IPC High Density"
  rrect25% 0.65x0.4 smd: 1(-1.025,0.65) 2(-1.025,0) 3(-1.025,-0.65) 4(1.025,-0.65) 5(1.025,0) 6(1.025,0.65)
  silkscreen extent -1.15,-1.1 0.3,1.52, body extent -1.14,-1 1.14,1, height 0.94
DDA0008E_N [mm] "SOP, 8-Leads, Body 4x5mm, Pitch 1.27mm, Thermal Pad 2.4x3.1mm, IPC Medium Density"
  rrect17% 1.45x0.6 smd: 1(-2.725,1.905) 2(-2.725,0.635) 3(-2.725,-0.635) 4(-2.725,-1.905) 5(2.725,-1.905) 6(2.725,-0.635) 7(2.725,0.635) 8(2.725,1.905)
  rrect4% 2.4x3.1 smd: 9(0,0)
  silkscreen extent -2.85,-2.5 1.6,2.88, body extent -2.98,-2.45 2.98,2.45, height 1.5
DQJ8 [mm]
  rect 0.63x0.65 smd paste-0.1: 1(-2.735,1.905) 2(-2.735,0.635) 3(-2.735,-0.635) 4(-2.735,-1.905) 5(2.735,-1.905) 6(2.735,-0.635) 7(2.735,0.635) 8(2.735,1.905)
  Component Side region: 2.745,0 2.745,2.23 -1.545,2.23 -1.545,0
  Component Side region: 2.745,0 2.745,-2.23 -1.545,-2.23 -1.545,0
  silkscreen extent -4.17,-2.63 3.03,2.63, body extent -2.9,-2.5 2.9,2.5, height 2.06
DSQ10_P9X1P5 [mm]
  rect 0.7x0.23 smd paste-0.115 mask+0: 1(-1.05,0.8) 2(-1.05,0.4) 3(-1.05,0) 4(-1.05,-0.4) 5(-1.05,-0.8) 6(1.05,-0.8) 7(1.05,-0.4) 8(1.05,0) 9(1.05,0.4) 10(1.05,0.8)
  rect 0.914x1.499 smd paste-0.737 mask-0.737: 11(0,0)
  Component Side region: 0,-0.749 0,-0.749 0,-0.749 0,-0.749 0,-0.749 0,-0.749 0,-0.749 0,-0.749
  Component Side region: 0,0.749 0,0.749 0,0.749 0,0.749 0,0.749 0,0.749 0,0.749 0,0.749
  silkscreen extent -0.5,1.18 0.5,1.18, body extent -1.05,-1.05 1.05,1.05, height 0.79
"Fuse Holder 3588" [mil] "Keystone Electronics 3588 Automotive Blade Fuse Holder, SMT"
  rect 62x111 smd: 1(-195,-120) 1(-195,120) 2(195,-120) 2(195,120)
  silkscreen extent -315,-135 310,135, body extent -316,-173 314,172, height 686
IND_SRP6540-100M [mm]
  rect 1.85x3.4 smd: 1(-2.775,0) 2(2.775,0)
  silkscreen extent -3.6,-3.25 3.6,3.25, body extent -3.59,-3.25 3.59,3.25, height 3.97
LED_0805 [mm] "Liteon 0805 Chip LED"
  rect 1.25x1.1 smd: 1(-1.175,0) 2(1.175,0)
  silkscreen extent -2.01,-0.8 0.2,0.8, body extent -1,-0.63 1,0.63, height 0.8
LFUS-DO-214AC-A-2_V [mm] "Molded Diode, 2-Leads, Body 4.6x2.79mm"
  rect 2.1x1.8 smd: 1(-2.2,0) 2(2.2,0)
  silkscreen extent -2.3,-1.4 2.3,1.4, body extent -2.52,-1.4 2.52,1.4, height 2.29
MICL-SOICN-8LD-PL-1_V [mm] "SOIC, 8-Leads, Body 5x4mm, Pitch 1.27mm"
  oval 2.2x0.7 smd: 1(-2.75,1.905) 2(-2.75,0.635) 3(-2.75,-0.635) 4(-2.75,-1.905) 5(2.75,-1.905) 6(2.75,-0.635) 7(2.75,0.635) 8(2.75,1.905)
  silkscreen extent -2.87,-2.5 1.25,2.93, body extent -3.01,-2.44 3.01,2.45, height 1.73
"MOLEX NANO-FIT 2X7 - Right Angle" [mm]
  round 1.56 hole 1.2: 1(15,2.5) 2(12.5,2.5) 3(10,2.5) 4(7.5,2.5) 5(5,2.5) 6(2.5,2.5) 7(0,2.5) 8(15,0) 9(12.5,0) 10(10,0) 11(7.5,0) 12(5,0) 13(2.5,0) 14(0,0)
  round 2.1 hole 1.7: ""(-0.05,-7.225) ""(14.925,-7.225)
  body extent -2.68,-26.05 17.53,2.78, height 10.21
"MOUNTING HOLE #4-40" [mm] "Mounting Hole for ANSI #4-40 w/ Flat Washer, Loose Fit"
  round 6.1 hole 3.7: 0(0,0)
MURA-NCP18XH103F03RB-2_V [mm] "Chip, 2-Leads, Body 1.6x0.8mm"
  rect 0.65x0.7 smd: 1(-0.675,0) 2(0.675,0)
  silkscreen extent -1.45,-0.05 -1.35,0.05, body extent -0.8,-0.4 0.8,0.4, height 0.8
Net_Tie_80mil [mm]
  rect 1x1 smd: 1(0,0) 2(2.032,0)
  Component Side lines w1.016: 0,0 2.032,0
  silkscreen extent -1.02,-1.02 3.05,1.02
ONSC-SOT-23-3-318-08_V [mm] "SOT23, 3-Leads, Body 2.92x1.3mm, Pitch 0.95mm"
  rect 0.9x0.8 smd: 1(-1,0.95) 2(-1,-0.95) 3(1,0)
  silkscreen extent -1.13,-1.46 0.65,2.02, body extent -0.65,-1.46 0.65,1.46, height 1.11
ONSC-SOT-223-4-318E-04_V [mm] "SOT223, 4-Leads, Body 6.5x3.5mm, Pitch 2.3mm"
  rect 2x1.5 smd: 1(-3.15,2.3) 2(-3.15,0) 3(-3.15,-2.3)
  rect 2x3.8 smd: 4(3.15,0)
  silkscreen extent -3.27,-3.25 1.75,3.72, body extent -1.75,-3.25 1.75,3.25, height 1.75
PW14 [mil]
  rect 66x14 smd paste+0 mask+0: 1(-111,76.77) 2(-111,51.18) 3(-111,25.59) 4(-111,0) 5(-111,-25.59) 6(-111,-51.18) 7(-111,-76.77) 8(111,-76.77) 9(111,-51.18) 10(111,-25.59) 11(111,0) 12(111,25.59) 13(111,51.18) 14(111,76.77)
  silkscreen extent -94,-106 164,106, body extent -130,-101 130,101, height 47
PW0014A_N [mm] "SOP, 14-Leads, Body 5.1x4.5mm, Pitch 0.65mm, IPC Medium Density"
  rrect22% 1.4x0.45 smd: 1(-2.95,1.95) 2(-2.95,1.3) 3(-2.95,0.65) 4(-2.95,0) 5(-2.95,-0.65) 6(-2.95,-1.3) 7(-2.95,-1.95) 8(2.95,-1.95) 9(2.95,-1.3) 10(2.95,-0.65) 11(2.95,0) 12(2.95,0.65) 13(2.95,1.3) 14(2.95,1.95)
  silkscreen extent -3.07,-2.55 1.85,2.85, body extent -3.21,-2.5 3.21,2.5, height 1
RESC0603(1608)_L [mm] "Chip Resistor, Body 1.6x0.8mm, IPC High Density"
  rect 0.7x0.9 smd: 1(-0.7,0) 2(0.7,0)
  silkscreen extent -0.05,-0.35 0.05,0.35, body extent -0.85,-0.47 0.85,0.47, height 0.6
RESC0603(1608)_N [mm] "Chip Resistor, Body 1.6x0.8mm, IPC Medium Density"
  rect 0.9x1 smd: 1(-0.8,0) 2(0.8,0)
  silkscreen extent -0.05,-0.4 0.05,0.4, body extent -0.85,-0.47 0.85,0.47, height 0.6
SBRT15U50SP5-13 [mm]
  rect 1.39x1.4 smd: 1(-0.92,-3.982) 1(0.92,-3.982)
  rect 3.36x4.86 smd: 2(0,0)
  silkscreen extent -2.2,-4.5 2.2,3.52, body extent -2,-4.6 2,2.4, height 1.05
"Test Point Loop - Black" [mil] ", black"
  round 80 hole 40: 1(0,0)
  body extent -50,-50 50,50, height 180
WSLP59312L000FEA [mm] "0.002R 8W Shunt"
  rect 5.2x8.75 smd: 1(0,0) 2(10.8,0)
  silkscreen extent 3.05,-4.19 7.75,4.06, body extent -2.17,-3.94 12.83,3.81, height 0.89
XT90 [mm]
  round 9.5 hole 6.2: 1(0,0) 2(11.176,0)
  silkscreen extent -4.99,-5.21 16.41,5.21, body extent -4.99,-5.5 16.41,5.5, height 20.7

## Part data
C1 C4 C15 C17 C37 C39: library part CMP-1035-02740-1, "CAP 1uF 25V ±10% 0603 (1608 Metric) Thickness 1mm SMD", Case-EIA=0603, Case-Metric=1608, Rated Voltage="25 V", Tolerance=Â±10%, Max Thickness="1 mm", Technology=SMT
C2 C5: library part CMP-1035-00915-1, "CAP 30pF 50V ±10% 0603 (1608 Metric) Thickness 1mm SMD", Case-EIA=0603, Case-Metric=1608, Rated Voltage="50 V", Tolerance=Â±10%, Max Thickness="1 mm", Technology=SMT
C3 C6 C21 C28 C32 C34 C35 C36: library part CMP-1035-02595-1, "CAP 100nF 100V ±10% 0603 (1608 Metric) Thickness 1mm SMD", Case-EIA=0603, Case-Metric=1608, Rated Voltage="100 V", Tolerance=Â±10%, Max Thickness="1 mm", Technology=SMT
C7 C8 C10 C12 C13 C14 C22 C23 C24 C29: library part CMP-1037-04922-1, "CAP 4.7uF 35V ±10% 1206 (3216 Metric) Thickness 1.9mm SMD", Case-EIA=1206, Case-Metric=3216, Rated Voltage="35 V", Tolerance=Â±10%, Max Thickness="1.9 mm", Technology=SMT
  C7 C13 C22 C23: Supplier 1=Digi-Key
C9 C11 C26: library part CMP-1037-05003-1, "CAP 47uF 16V ±20% 1206 (3216 Metric) Thickness 1.9mm SMD", Case-EIA=1206, Case-Metric=3216, Rated Voltage="16 V", Tolerance=Â±20%, Max Thickness="1.9 mm", Technology=SMT
C16: library part CMP-1035-00615-1, "CAP 12pF 50V ±0.25pF 0603 (1608 Metric) Thickness 1mm SMD", Case-EIA=0603, Case-Metric=1608, Rated Voltage="50 V", Tolerance=Â±0.25pF, Max Thickness="1 mm", Technology=SMT
C18: library part CMP-1035-02724-1, "CAP 680nF 50V ±10% 0603 (1608 Metric) Thickness 1mm SMD", Case-EIA=0603, Case-Metric=1608, Rated Voltage="50 V", Tolerance=Â±10%, Max Thickness="1 mm", Technology=SMT
C19 C40: library part CMP-1035-02315-1, "CAP 10nF 25V ±2% 0603 (1608 Metric) Thickness 1mm SMD", Case-EIA=0603, Case-Metric=1608, Rated Voltage="25 V", Tolerance=Â±2%, Max Thickness="1 mm", Technology=SMT
C20: library part CMP-1035-01189-1, "CAP 75pF 25V ±1% 0603 (1608 Metric) Thickness 1mm SMD", Case-EIA=0603, Case-Metric=1608, Rated Voltage="25 V", Tolerance=Â±1%, Max Thickness="1 mm", Technology=SMT
C25: library part CMP-1037-04993-1, "CAP 22uF 16V ±20% 1206 (3216 Metric) Thickness 1.9mm SMD", Case-EIA=1206, Case-Metric=3216, Rated Voltage="16 V", Tolerance=Â±20%, Max Thickness="1.9 mm", Technology=SMT
C27: library part CMP-1037-04982-1, "CAP 10uF 50V ±10% 1206 (3216 Metric) Thickness 1.9mm SMD", Case-EIA=1206, Case-Metric=3216, Rated Voltage="50 V", Tolerance=Â±10%, Max Thickness="1.9 mm", Technology=SMT
C30 C33: library part CMP-1038-02286-1, "CAP 22uF 25V -20% to +80% 1210 (3225 Metric) Thickness 2.2mm SMD", Case-EIA=1210, Case-Metric=3225, Rated Voltage="25 V", Tolerance="-20% to +80%", Max Thickness="2.2 mm", Technology=SMT
C31 C38: library part CMP-1035-02580-1, "CAP 100nF 10V ±10% 0603 (1608 Metric) Thickness 1mm SMD", Case-EIA=0603, Case-Metric=1608, Rated Voltage="10 V", Tolerance=Â±10%, Max Thickness="1 mm", Technology=SMT
D1 D11 D18 D19 D20 D21 D22: library part LED0, "led", Color=Green, Current - Test=20mA, Lens Color=Colorless, Manufacturer="Lite-On Inc.", Manufacturer Part Number=LTST-C171KGKT, Millicandela Rating=35mcd, Package / Case="0805 (2012 Metric)", Supplier Part Number 1=160-1426-1-ND, Voltage - Forward (Vf) (Typ)=2V, Category=Optoelectronics, ComponentLink1Description=http://optoelectronics.liteon.com/upload/download/DS22-2000-118/LTST-C171KGKT.pdf, ComponentLink1URL=http://optoelectronics.liteon.com/upload/download/DS22-2000-118/LTST-C171KGKT.pdf, Features=-, Height (Max)=0.90mm, Lens Style/Size="Rectangle with Flat Top, 1.40mm x 1.25mm", Lens Transparency=Clear, Mounting Type="Surface Mount", Packaging="Cut Tape (CT)", Part Status=Active, Pricing 1="1=0.31, 10=0.225, 25=0.1656, 100=0.1183, 250=0.0804, 500=0.07096, 1000=0.05558 (USD)", RoHS="RoHS Compliant", Size / Dimension="2.00mm L x 1.25mm W", Stock 1=350441, Supplier 1=Digi-Key, Viewing Angle=130°, Wavelength - Dominant=571nm, Wavelength - Peak=574nm
D2 D15 D16: Capacitance @ Vr, F=-, Current - Average Rectified (Io)=15A, Manufacturer="Diodes Incorporated", Operating Temperature - Junction="-65°C ~ 150°C", Package / Case="PowerDI™ 5", Supplier Device Package=PowerDI®5, Supplier Part Number 1=SBRT15U50SP5-13DICT-ND, Category="Discrete Semiconductor Products", ComponentLink1Description=https://media.digikey.com/pdf/Data%20Sheets/Diodes%20PDFs/SBRT15U50SP5.pdf, ComponentLink1URL=https://media.digikey.com/pdf/Data%20Sheets/Diodes%20PDFs/SBRT15U50SP5.pdf, Diode Type="Super Barrier", Manufacturer Part Number=SBRT15U50SP5-13, Mounting Type="Surface Mount", Packaging="Cut Tape (CT)", Part Status=Active, Pricing 1="1=0.93, 10=0.823, 100=0.6306, 500=0.49852, 1000=0.39882 (USD)", RoHS="RoHS Compliant", Speed="Fast Recovery =< 500ns, > 200mA (Io)", Stock 1=12134, Supplier 1=Digi-Key
D3: library part CMP-2000-07088-1, "Transient Voltage Suppression Diode, 30 V, -65 to 150 degC, 2-Pin SMD, RoHS, Tape and Reel", Capacitance @ Frequency=-, Current - Peak Pulse (10/1000µs)=8.3A, Manufacturer=Littelfuse-Inc., Operating Temperature=-55°C~150°C(TJ), Package / Case=DO-214AC,SMA, Package Description="2-Pin Surface Mount Device, Body 4.295 x 2.595 mm", Package Reference=DO-214AC, Power - Peak Pulse=400W, Power Line Protection=No, Supplier Device Package=DO-214AC(SMA), Voltage - Breakdown (Min)=33.3V, Voltage - Clamping (Max) @ Ipp=48.4V, Voltage - Reverse Standoff (Typ)=30V, Applications=GeneralPurpose, Bidirectional Channels=1, Category=CircuitProtection, Datasheet URL=http://www.littelfuse.com/~/media/electronics/datasheets/tvs_diodes/littelfuse_tvs_diode_smaj_datasheet.pdf.pdf, Datasheet Version=11/2015, Family=TVS-Diodes, Manufacturer URL=http://www.littelfuse.com/, Mounting Technology=SurfaceMount, Mounting Type=SurfaceMount, Packaging=Digi-Reel®, Series=SMAJ, Type=Zener, Unidirectional Channels=-
D4 D5 D14 D17: library part LED0, "led /  LTST-C171KRKT", Color=Red, Current - Test=20mA, Lens Color=Colorless, Manufacturer="Lite-On Inc.", Manufacturer Part Number=LTST-C171KRKT, Millicandela Rating=54mcd, Package / Case="0805 (2012 Metric)", Supplier Part Number 1=160-1427-1-ND, Voltage - Forward (Vf) (Typ)=2V, Category=Optoelectronics, ComponentLink1Description=http://optoelectronics.liteon.com/upload/download/DS22-2000-109/LTST-C171KRKT.pdf, ComponentLink1URL=http://optoelectronics.liteon.com/upload/download/DS22-2000-109/LTST-C171KRKT.pdf, Features=-, Height (Max)=0.80mm, Lens Style/Size="Rectangle with Flat Top, 1.40mm x 1.25mm", Lens Transparency=Clear, Mounting Type="Surface Mount", Packaging="Cut Tape (CT)", Part Status=Active, Pricing 1="1=0.31, 10=0.225, 25=0.1656, 100=0.1183, 250=0.0804, 500=0.07096, 1000=0.05558 (USD)", RoHS="RoHS Compliant", Size / Dimension="2.00mm L x 1.25mm W", Stock 1=260544, Supplier 1=Digi-Key, Viewing Angle=130°, Wavelength - Dominant=631nm, Wavelength - Peak=639nm
D6: library part CMP-1060-01222-1, "24 W Peak Power Zener Transient Voltage Suppressor, Dual Common Anode Zeners for ESD Protection, 3-Pin SOT-23, Pb-Free, Tape and Reel", Manufacturer="On Semiconductor", ComponentLink1Description="Manufacturer URL", ComponentLink1URL=http://www.onsemi.com/, ComponentLink2Description=Datasheet, ComponentLink2URL=http://www.onsemi.cn/pub_link/Collateral/MMBZ5V6ALT1-D.PDF, ComponentLink3Description="Package Specification", ComponentLink3URL=http://www.onsemi.cn/pub_link/Collateral/318-08.PDF, DatasheetVersion="Rev. 13", Mounting Technology="Surface Mount", PackageDescription="3-Pin Small Outline Transistor, Body 2.92 x 1.3 mm, Pitch 0.95 mm", PackageReference=SOT-23-3-318-08, PackageVersion="Rev. AP, 11/2009", Packing="Tape and Reel", PartNumber=MMBZ5V6ALT1G, RoHS=Pb-Free, VZ Typ (V)=5.6
D7 D8 D9: library part LED0, "led /  LTST-C171KRKT", Color=Green, Current - Test=20mA, Lens Color=Colorless, Manufacturer="Lite-On Inc.", Manufacturer Part Number=LTST-C171KGKT, Millicandela Rating=35mcd, Package / Case="0805 (2012 Metric)", Supplier Part Number 1=160-1426-1-ND, Voltage - Forward (Vf) (Typ)=2V, Category=Optoelectronics, ComponentLink1Description=http://optoelectronics.liteon.com/upload/download/DS22-2000-118/LTST-C171KGKT.pdf, ComponentLink1URL=http://optoelectronics.liteon.com/upload/download/DS22-2000-118/LTST-C171KGKT.pdf, Features=-, Height (Max)=0.90mm, Lens Style/Size="Rectangle with Flat Top, 1.40mm x 1.25mm", Lens Transparency=Clear, Mounting Type="Surface Mount", Packaging="Cut Tape (CT)", Part Status=Active, Pricing 1="1=0.31, 10=0.225, 25=0.1656, 100=0.1183, 250=0.0804, 500=0.07096, 1000=0.05558 (USD)", RoHS="RoHS Compliant", Size / Dimension="2.00mm L x 1.25mm W", Stock 1=350441, Supplier 1=Digi-Key, Viewing Angle=130°, Wavelength - Dominant=571nm, Wavelength - Peak=574nm
D10 D12 D13: library part LED0, "led /  LTST-C171KSKT", Color=Green, Current - Test=20mA, Lens Color=Colorless, Manufacturer="Lite-On Inc.", Manufacturer Part Number=LTST-C171KSKT, Millicandela Rating=35mcd, Package / Case="0805 (2012 Metric)", Supplier Part Number 1=160-1428-1-ND, Voltage - Forward (Vf) (Typ)=2V, Category=Optoelectronics, ComponentLink1Description=http://optoelectronics.liteon.com/upload/download/DS22-2000-110/LTST-C171KSKT.pdf, ComponentLink1URL=http://optoelectronics.liteon.com/upload/download/DS22-2000-110/LTST-C171KSKT.pdf, Features=-, Height (Max)=0.90mm, Lens Style/Size="Rectangle with Flat Top, 1.40mm x 1.25mm", Lens Transparency=Clear, Mounting Type="Surface Mount", Packaging="Cut Tape (CT)", Part Status=Active, Pricing 1="1=0.31, 10=0.225, 25=0.1656, 100=0.1183, 250=0.0804, 500=0.07096, 1000=0.05558 (USD)", RoHS="RoHS Compliant", Size / Dimension="2.00mm L x 1.25mm W", Stock 1=350441, Supplier 1=Digi-Key, Viewing Angle=130°, Wavelength - Dominant=571nm, Wavelength - Peak=574nm
F1 F2 F3 F4: library part "3588 Fuse Holder", "Keystone Electronics 3588", Supplier Part Number 1=36-3588-ND, Datasheet=http://keyelco.com/userAssets/file/M65p43.pdf, Supplier 1=Digi-Key
L1 L2: library part SRP5030TA_8R2, Supplier Part Number 1=SRP6540-8R2MCT-ND, ComponentLink1Description=http://www.bourns.com/docs/Product-Datasheets/SRP5030TA.pdf, ComponentLink1URL=http://www.bourns.com/docs/Product-Datasheets/SRP5030TA.pdf, Supplier 1=Digi-Key
L3: "Inductor Power Shielded/Molded Wirewound 10uH 20% 100KHz Powdered Iron 4A 78.5mOhm DCR T/R", Package="Nonstandard Bourns", Digi-Key_Part_Number=SRP6540-100MCT-ND, Digi-Key_Purchase_URL=https://www.digikey.com/product-detail/en/bourns-inc/SRP6540-100M/SRP6540-100MCT-ND/3986041?utm_source=snapeda&utm_medium=aggregator&utm_campaign=symbol, MF=Bourns, MP=SRP6540-100M, SnapEDA_Link=https://www.snapeda.com/parts/SRP6540-100M/Bourns/view-part/?ref=snap
L4: library part SRP5030TA, DC Resistance (DCR)="76.2 mOhm Max", Manufacturer="Bourns Inc.", Manufacturer Part Number=SRP5030TA-6R8M, Operating Temperature="-40°C ~ 150°C", Package / Case=Nonstandard, Q @ Freq="15 @ 100kHz", Ratings=AEC-Q200, Supplier Device Package=-, Supplier Part Number 1=SRP5030TA-6R8MCT-ND, Tolerance=±20%, Category="Inductors, Coils, Chokes", ComponentLink1Description=http://www.bourns.com/docs/Product-Datasheets/SRP5030TA.pdf, ComponentLink1URL=http://www.bourns.com/docs/Product-Datasheets/SRP5030TA.pdf, Height - Seated (Max)="0.118\" (3.00mm)", Material - Core="Carbonyl Powder", Mounting Type="Surface Mount", Packaging="Cut Tape (CT)", Part Status=Active, Pricing 1="1=1.51, 10=1.397, 100=0.9781, 500=0.79178, 1000=0.72191 (USD)", RoHS="RoHS Compliant", Shielding=Shielded, Size / Dimension="0.224\" L x 0.205\" W (5.70mm x 5.20mm)", Stock 1=5626, Supplier 1=Digi-Key, Type=Wirewound
MH1 MH2 MH3 MH4: library part "Mounting Hole #4-40, Loose Fit", "Mounting Hole for ANSI #4-40 w/ Flat Washer, Loose Fit", Datasheet=http://blogs.mentor.com/tom-hausherr/blog/tag/pcb-mounting-holes/
NT1: "Use to tie together nets"
P1 P3: "NanoFit Right Hdr TH DR 14Ckt", Manufacturer=Molex, Part Number=105314-1214, Supplier Part Number=538-105314-1214, ComponentLink1Description="Mouser Link", ComponentLink1URL=https://www.mouser.com/ProductDetail/Molex/105314-1214?qs=PqFvFmEiOr6wLIXpvlvqbA%3D%3D, Supplier=Mouser, Supplier 1=Mouser, Supplier Part Number 1=538-105314-1214
Q1 Q2: library part CMP-1058-00713-1, "Power MOSFET, -10 A, -20 V, P-Channel, 4-Pin SOT-223, Pb-Free, Tape and Reel", Manufacturer="On Semiconductor", Package Type="SOT-223-4 / TO-261-4", Channel Polarity="P Channel", ComponentLink1Description="Manufacturer URL", ComponentLink1URL=http://www.onsemi.com/, ComponentLink2Description=Datasheet, ComponentLink2URL=http://www.onsemi.com/pub_link/Collateral/NTF6P02T3-D.PDF, ComponentLink3Description="Package Specification", ComponentLink3URL=http://www.onsemi.com/pub_link/Collateral/318E-04.PDF, Configuration=Single, DatasheetVersion="Rev. 6", Mounting Technology="Surface Mount", PackageDescription="4-Pin Small Outline Transistor, Body 6.5 x 3.5 mm, Pitch 2.3 mm", PackageReference=SOT-223-4-318E-04, PackageVersion="Rev. N, 08/2009", Packing="Tape and Reel", PartNumber=NVF6P02T3G, PD Max (W)=8.3, Qrr Typ (nC)=36, RoHS=Pb-Free, V(BR)DSS Min (V)=20, VGS(th) Max (V)=1, VGS Max (V)=8
Q3 Q4: library part CMP-1058-00752-1, "Power MOSFET, -20 V, -1.3 A, P-Channel, 3-Pin SOT-23, Pb-Free, Tape and Reel", Manufacturer="On Semiconductor", Package Type=SOT-23-3, Channel Polarity="P Channel", Ciss Typ (pF)=225, ComponentLink1Description="Manufacturer URL", ComponentLink1URL=http://www.onsemi.com/, ComponentLink2Description=Datasheet, ComponentLink2URL=http://www.onsemi.cn/pub_link/Collateral/NTR1P02LT1-D.PDF, ComponentLink3Description="Package Specification", ComponentLink3URL=http://www.onsemi.cn/pub_link/Collateral/318-08.PDF, Configuration=Single, Coss Typ (pF)=130, Crss Typ (pF)=55, DatasheetVersion="Rev. 13", ID Max (A)=1.3, Mounting Technology="Surface Mount", PackageDescription="3-Pin Small Outline Transistor, Body 2.92 x 1.3 mm, Pitch 0.95 mm", PackageReference=SOT-23-3-318-08, PackageVersion="Rev. AP, 11/2009", Packing="Tape and Reel", PartNumber=NVTR01P02LT1G, PD Max (W)=0.4, Qrr Typ (nC)=8.5, RoHS=Pb-Free, V(BR)DSS Min (V)=20, VGS(th) Max (V)=1.25, VGS Max (V)=12
R1 R36 R44: library part CMP-1012-00518-1, "1K2 0.1W 1% 0603 (1608 Metric)  SMD", Case-EIA=0603, Case-Metric=1608, Power="0.1 W", Tolerance="1 %", Technology=SMT
R2 R4: library part CMP-1012-00730-1, "88K7 0.1W 1% 0603 (1608 Metric)  SMD", Case-EIA=0603, Case-Metric=1608, Power="0.1 W", Tolerance="1 %", Technology=SMT
R3 R7 R20 R30: library part CMP-1012-00586-1, "4K7 0.1W 1% 0603 (1608 Metric)  SMD", Case-EIA=0603, Case-Metric=1608, Power="0.1 W", Tolerance="1 %", Technology=SMT
R5 R6 R10 R11: library part CMP-1012-00660-1, "22K1 0.1W 1% 0603 (1608 Metric)  SMD", Case-EIA=0603, Case-Metric=1608, Power="0.1 W", Tolerance="1 %", Technology=SMT
R8: library part CMP-1012-00768-1, "200K 0.1W 1% 0603 (1608 Metric)  SMD", Case-EIA=0603, Case-Metric=1608, Power="0.1 W", Tolerance="1 %", Technology=SMT
R9: library part CMP-1012-00703-1, "51K 0.1W 1% 0603 (1608 Metric)  SMD", Case-EIA=0603, Case-Metric=1608, Power="0.1 W", Tolerance="1 %", Technology=SMT
R12 R15 R18 R22: library part CMP-1012-00098-1, "10K 0.1W 5% 0603 (1608 Metric)  SMD", Case-EIA=0603, Case-Metric=1608, Power="0.1 W", Tolerance="5 %", Technology=SMT
R13 R14: library part WSLP59312L000FEA
R16 R17 R25 R29 R33 R34 R35 R37 R38 R39 R43: library part CMP-1012-00050-1, "100R 0.1W 5% 0603 (1608 Metric)  SMD", Case-EIA=0603, Case-Metric=1608, Power="0.1 W", Tolerance="5 %", Technology=SMT
R19 R23 R24 R28 R31 R32: library part CMP-1012-00397-1, "100R 0.1W 1% 0603 (1608 Metric)  SMD", Case-EIA=0603, Case-Metric=1608, Power="0.1 W", Tolerance="1 %", Technology=SMT
R21: library part CMP-1012-00609-1, "7K5 0.1W 1% 0603 (1608 Metric)  SMD", Case-EIA=0603, Case-Metric=1608, Power="0.1 W", Tolerance="1 %", Technology=SMT
R26: library part CMP-1012-00646-1, "16K5 0.1W 1% 0603 (1608 Metric)  SMD", Case-EIA=0603, Case-Metric=1608, Power="0.1 W", Tolerance="1 %", Technology=SMT
R27: library part CMP-1012-00787-1, "294K 0.1W 1% 0603 (1608 Metric)  SMD", Case-EIA=0603, Case-Metric=1608, Power="0.1 W", Tolerance="1 %", Technology=SMT
R40: library part CMP-1012-00473-1, "470R 0.1W 1% 0603 (1608 Metric)  SMD", Case-EIA=0603, Case-Metric=1608, Power="0.1 W", Tolerance="1 %", Technology=SMT
R41 R42: library part CMP-1012-00058-1, "220R 0.1W 5% 0603 (1608 Metric)  SMD", Case-EIA=0603, Case-Metric=1608, Power="0.1 W", Tolerance="5 %", Technology=SMT
RT1: library part CMP-2000-05271-1, "NTC Thermistor, 10 KOhm, +/- 1%, 0.1 W, -40 to 125 degC, 0603 (1608 Metric), RoHS, Tape and Reel", Manufacturer=Murata, Rated Current=310A, Resistance=10kO, Temperature Range=-40to+125degC, Tolerance (%)=±1%, B-constant=3434K, Datasheet URL=http://www.jameco.com/Jameco/Products/ProdDS/1870999.pdf, Datasheet Version=Apr-05, Manufacturer URL=http://www.murata.com/, Type=NTC
TP1 TP2 TP3 TP4 TP5 TP6 TP7 TP8 TP9 TP10: "Keyston Electronics 5001 Test Point Loop", Color=Black, Manufacturer="Keystone Electronics", Manufacturer P/N=5001, Supplier Part Number 1=36-5001-ND, Supplier 1=Digi-Key
U1 U2 U4 U5: Current - Output=3A, Frequency - Switching=400kHz, Manufacturer="Texas Instruments", Manufacturer Part Number=LMR23630AFQDDARQ1, Operating Temperature="-40°C ~ 125°C (TJ)", Package / Case="8-SOIC (0.154\", 3.90mm Width) Exposed Pad", Supplier Device Package="8-SO PowerPad", Supplier Part Number 1=296-45260-6-ND, Voltage - Input (Max)=36V, Voltage - Input (Min)=4.5V, Voltage - Output (Max)=28V, Voltage - Output (Min/Fixed)=1V, Category="Integrated Circuits (ICs)", ComponentLink1Description=http://www.ti.com/lit/ds/symlink/lmr23630-q1.pdf, ComponentLink1URL=http://www.ti.com/lit/ds/symlink/lmr23630-q1.pdf, Function=Step-Down, Mounting Type="Surface Mount", Number of Outputs=1, Output Configuration=Positive, Output Type=Adjustable, Packaging=Digi-Reel®, Part Status=Active, Pricing 1="1=3.97, 10=3.564, 100=2.9204, 500=2.48604, 1000=2.09667 (USD)", RoHS="RoHS Compliant", Stock 1=1636, Supplier 1=Digi-Key, Synchronous Rectifier=Yes, Topology=Buck
U3 U8 U9: library part CSD18563Q5A, "No Description Available", Built_By=EMA_UL_Team, Copyright="Copyright (C) 2018 Accelerated Designs. All rights reserved", Manufacturer_Part_Number=CSD18563Q5A, RefDes=RefDes, Type=DEV, Vendor="Texas Instruments"
U6 U11: library part CMP-1558-00003-1, "High-Speed High-Side MOSFET Driver, 12 to 36 V, -40 to 85 degC, 8-Pin SOIC, RoHS, Tube", Temperature Max="85 degC", Temperature Min="-40 degC", ComponentLink1Description="Manufacturer URL", ComponentLink1URL=http://www.micrel.com/, ComponentLink2Description=Datasheet, ComponentLink2URL=http://www.micrel.com/_PDF/mic5021.pdf, ComponentLink3Description="Package Specification", ComponentLink3URL=http://www.micrel.com/_Packages/SOICN-8LD-PL-1.pdf, Mounting Technology="Surface Mount", PackageDescription="8-Pin Small Outline Integrated Package, Body 4.89 x 3.90 mm, Pitch 1.27 mm", PackageVersion="Rev. A", Packing=Tube, PartNumber=MIC5021YM, RoHS=TRUE, VDD Max="36 V", VDD Min="12 V"
U7: library part CMP-0859-00512-3, "Automotive Catalog Configurable Multiple-Function Gate, DCK0006A, LARGE T&R", F @ Nom Voltage(Max)(Mhz)=150, Generic Part Number=SN74LVC1G97-Q1, ICC @ Nom Voltage(Max)(mA)=0.01, Manufacturer="Texas Instruments", Operating Temperature Range(C)="-40 to 125", Rating=Automotive, tpd @ Nom Voltage(Max)(ns)=16.4,9.3,7.3,6.1, Voltage(Nom)(V)=1.8,2.5,3.3,5, 3-State Output=No, Bits(#)=1, DatasheetVersion=SCES561D, Gate Type=Configurable, Input Type=CMOS/TTL, Logic=True, Output Drive (IOL/IOH)(Max)(mA)=32/-32, Output Type=CMOS, PackageReference=DCK0006A, Schmitt Trigger=No, Sub-Family="Configurable Logic", Technology Family=LVC, VCC(Max)(V)=5.5, VCC(Min)(V)=1.65
U10: "No Description Available", Built_By=EMA_UL_Team, Copyright="Copyright (C) 2018 Accelerated Designs. All rights reserved", Manufacturer_Part_Number=BQ34Z100PWR-G1, RefDes=RefDes, Type=DEV, Vendor="Texas Instruments"
U12: library part INA300AIDSQT, "No Description Available", Built_By=EMA_UL_Team, Copyright="Copyright (C) 2018 Accelerated Designs. All rights reserved", Manufacturer_Part_Number=INA300AIDSQT, RefDes=RefDes, Type=DEV, Vendor="Texas Instruments"
U13: library part CMP-0780-00173-3, "8-Bit Parallel-Out Serial Shift Registers, PW0014A, TUBE", F @ Nom Voltage(Max)(Mhz)=28, Generic Part Number=SN74HC164, ICC @ Nom Voltage(Max)(mA)=0.08, Manufacturer="Texas Instruments", Operating Temperature Range(C)="-40 to 125", Rating=Catalog, tpd @ Nom Voltage(Max)(ns)=38, Voltage(Nom)(V)=6, 3-State Output=No, Bits=4, Code_JEDEC=MO-153, DatasheetVersion=SCLS115F, Input Type=CMOS, Output Drive (IOL/IOH)(Max)(mA)=5.2/-5.2, Output Type=CMOS, PackageReference=PW0014A, PackageVersion=http://www.ti.com/lit/ml/mpds360/mpds360.pdf, Technology Family=HC, VCC(Max)(V)=6, VCC(Min)(V)=2

## Via types
v1: diameter 30, hole 15, Component Side to Solder Side, tented both sides, 223 vias
v2: diameter 20, hole 10, Component Side to Solder Side, tented top, 18 vias
v3: diameter 32, hole 16, Component Side to Solder Side, tented both sides, 15 vias
v4: diameter 20, hole 10, Component Side to Solder Side, tented both sides, 6 vias

## Nets (pads, with @x,y where several pads share a name; then routed paths per layer and width w, separated by ;. In a path a pad name is that pad's centre, name@x,y a point inside that pad or via, vN(x,y) a via of type N, cw(c..) or ccw(c..) an arc to the next point about the centre after c; other vN are vias at no path point)
EXT_GATE: U3.4 U6.7 | length 390.7
  Component Side w10: U6.7@787.5,3080.77 787.5,3141.28 900,3253.78 U3.4@900,3424.82
GATE_EN: R18.1 U7.4 U11.2 | length 569.3
  Component Side w10: R18.1@2610,2576.5 2615.5,2571 2615.5,2499.41 2691.55,2423.36 2729.91,2423.36 U11.2@2733.27,2420 ; R18.1@2615.5,2588.58 2616.58,2587.5 v1(2668.09,2587.5) ; v1(2882.33,2587.5) 2887.74,2587.5 2894.73,2594.48 U7.4@2921.37,2594.48
  Solder Side w10: v1(2668.09,2587.5) 2700.66,2620.07 2855,2620.07 2882.33,2592.74 v1(2882.33,2587.5)
GND: C1.1 C4.1 C7.1 C8.1 C9.1 C10.1 C11.1 C12.1 C13.1 C14.1 C15.1 C17.1 C22.1 C23.1 C24.1 C25.1 C26.1 C27.1 C28.1 C29.1 C30.1 C31.1 C32.1 C33.1 C35.1 C36.1 C37.1 C38.1 C39.1 D1.1 D3.2 D6.3 D11.1 D15.1 D16.1 D18.1 D19.1 D20.1 D21.1 D22.1 J1.1 J2.1 J3.1 J4.1 J5.1 J6.1 J7.1 J8.1 J9.1 MH1.0 MH2.0 MH3.0 MH4.0 NT1.1 P1.8 P1.9 P1.10 P1.11 P1.12 P1.13 P1.14 P3.7 P3.8 P3.9 P3.12 P3.14 R5.1 R6.1 R10.1 R11.1 R12.2 R13.2 R14.2 R15.2 R16.2 R17.2 R18.2 R21.2 R26.1 TP7.1 TP9.1 U1.6 U1.8 U1.9 U2.6 U2.8 U2.9 U4.6 U4.8 U4.9 U5.6 U5.8 U5.9 U6.4 U7.2 U10.8 U11.4 U12.6 U12.8 U12.10 U12.11 U13.7 | length 4853.8
  Component Side w8: R18.2@2615.5,2651.57 v1(2668.09,2651.57) C31.1@2718.25,2651.57 2724.91,2651.57 2724.91,2628.22 2733.05,2620.07 U7.2@2840.66,2620.07 ; U12.10@3020.14,2418.41 3020.26,2418.53 3039.3,2418.53 3045.17,2424.41 3047.48,2424.41 U12.11@3061.48,2438.41 ; U12.8@3020.14,2449.91 U12.11@3061.48,2449.91 ; U12.6@3020.14,2481.41 3041.17,2481.41 3047.17,2475.41 3047.48,2475.41 3061.48,2461.41 U12.11@3061.48,2449.91 ; C38.1@3091.5,2359.24 3086.3,2364.43 3086.3,2386.24 3061.48,2411.06 U12.11@3061.48,2438.41 ; U12.11@3061.48,2438.41 U12.11@3061.48,2449.91
  Component Side w10: C30.1@842.04,2740 850.56,2748.52 850.56,2800.32 887.5,2837.26 U6.4@887.5,2864.23 U6.4@887.5,2869.78 ; U6.4@888.72,2871 R12.2@957.5,2871 ; D11.1@893.76,2275 1060.36,2275 1061.1,2274.26 1069.39,2274.26 1070.15,2275.02 1092.5,2275.02 ; v1(957.5,2810) R12.2@957.5,2863.5 ; R5.1@2591.13,3877.44 2591.13,3849.01 2612.64,3827.5 U1.9@2740.63,3827.5 ; R10.1@2608.94,3107.44 2608.94,3090.85 2619.2,3080.59 v2(2701.7,3080.59) 2723.35,3080.59 U4.9@2748.94,3055 2723.94,3030 U4.6@2723.94,2947.72 2723.94,2912.9 2703.82,2892.78 C28.1@2703.82,2870 ; v1(2660,2503.28) 2676.72,2520 U11.4@2733.27,2520 2778.98,2520 2838.86,2460.12 C33.1@2875,2460.12 ; D1.1@2739.64,4187.5 v1(2797.74,4187.5) ; C1.1@2820.06,4057.5 v1(2861.49,4057.5) ; C15.1@2831.5,3285 v1(2865.47,3285) ; U12.6@3020.14,2481.66 3020.14,2544.13 R21.2@3028.5,2552.5 ; C38.1@3091.5,2359.24 3092.55,2358.18 v1(3139.39,2358.18) ; R6.1@3246.76,3740 3248.92,3737.83 3248.92,3705.15 3264.07,3690 3375,3690 U2.9@3400,3690 ; R11.1@3260,3060.47 3301.42,3060.47 3323,3038.89 3371.11,3038.89 U5.9@3395,3015 3445,3065 3445,3233.28 3451.72,3240 C17.1@3472.56,3240 ; v1(3285.07,2328.72) 3316.25,2328.72 C39.1@3319.94,2332.41 C37.1@3319.94,2384.38 3319.94,2429.26 R26.1@3322.5,2431.82 ; R16.2@3330.42,2681.58 3330.42,2640.54 3334.69,2636.27 v1(3334.69,2630.86) ; C4.1@3475.98,3917.5 3515.65,3917.5 v1(3515.65,3920.01) ; R17.2@3627.92,2678.63 3627.92,2745.68 3633.78,2751.54 3636.42,2751.54 3650.12,2765.24 C29.1@3650.12,2780 3650.12,2786.3 3663.82,2800 R15.2@3716.84,2800 ; U10.8@3690.51,2361.23 3729.33,2361.23 3737.06,2353.49 3737.06,2303.95 v1(3738.51,2302.5) ; C35.1@3889.73,2342.97 C36.1@3939.73,2342.97 3939.73,2328.72 v1(3913.51,2302.5) ; D6.3@3899.14,2525.5 3936.98,2525.5 v1(3938.51,2527.03) ; v1(4572.22,2510) C32.1@4609.47,2510
  Component Side w17: v1(4433.86,2261.14) U13.7@4433.86,2298.23
  Component Side w30: D3.2@757.5,3979.11 MH1.0@757.5,4167.39 ; U1.6@2715.63,3720.22 2715.63,3802.5 U1.9@2740.63,3827.5 ; U5.6@3370,2907.72 3370,2990 U5.9@3395,3015 ; U2.6@3375,3582.72 U2.9@3375,3690 ; D18.1@5035,1889.43 5026.26,1880.69 D19.1@5026.26,1768.95 D20.1@5026.26,1640 D21.1@5026.26,1515 D22.1@5026.26,1390 5026.26,1326.24 MH4.0@5177.5,1175
  Solder Side w10: 1450,2482.64 1450,2544.36 1480.64,2575 NT1.1@1518.56,2575 ; v1@1518.56,2460.12 v1(1520,2460.12)
  other v1: 1110,2334.88 1155,2335 1200,2335 1295,2334.76 1340,2334.88 1385,2334.88 1520,2335 1565,2335.12 1610,2335.12 1705,2334.88 1750,2335 1795,2335 1110,2374.88 1155,2375 1200,2375 1295,2374.88 1340,2375 1385,2375 1520,2375 1565,2375.12 1610,2375.12 1705,2375 1750,2375.12 1795,2375.12 1110,2419.88 1155,2420 1200,2420 1295,2419.76 1340,2419.88 1385,2419.88 1520,2420 1565,2420.12 1610,2420.12 1705,2419.88 1750,2420 1795,2420 1110,2460 1155,2460.12 1200,2460.12 1295,2459.88 1340,2460 1385,2460 1565,2460.24 1610,2460.24 1705,2460 1750,2460.12 1795,2460.12 3640,2835.92 2967.38,2846.22 2870,2946.39 3540,2968.28 2871.16,2982.54 3540,2998.98 2871.16,3019.11
  other v2: 2701.7,3029.41 2748.94,3029.41 2792.25,3029.41 2748.94,3080.59 2792.25,3080.59 3352.76,3664.41 3400,3664.41 3443.31,3664.41 3352.76,3715.59 3400,3715.59 3443.31,3715.59 2693.38,3801.91 2740.63,3801.91 2783.93,3801.91 2693.38,3853.09 2740.63,3853.09 2783.93,3853.09
  other v3: 3614.82,3520 3614.82,3560 3541.43,3574.06 2939.17,3582.5 2935.42,3664.41 2860.8,3715.59
  other v4: 3347.76,2989.41 3395,2989.41 3438.31,2989.41 3347.76,3040.59 3395,3040.59 3438.31,3040.59
NetC1_2: C1.2 U1.3 | length 157.8
  Component Side w10: U1.3@2715.63,3934.78 2715.63,3975.63 2730,3990 2730,4047.66 2739.84,4057.5 C1.2@2764.94,4057.5
NetC2_1: C2.1 R2.1 R5.2 U1.4 | length 238.8
  Component Side w10: R5.2@2591.13,3932.56 2663.4,3932.56 U1.4@2665.63,3934.78 2667.72,3936.88 2667.72,3972.47 2696.27,4001.02 2696.27,4021.27 C2.1@2702.5,4027.5 2701.5,4028.5 R2.1@2701.5,4082.5
NetC2_2: C2.2 C7.2 C9.2 F1.1 L1.2 R2.2 | length 597.6
  Component Side w10: C2.2@2647.38,4027.5 2646.38,4028.5 R2.2@2646.38,4082.5 2646.38,4106.22 2660.16,4120 2942.09,4120 3095.59,3966.5
NetC3_1: C3.1 L1.1 U1.1 | length 74.6
  Component Side w10: U1.1@2815.63,3934.78 2815.63,4003.07 C3.1@2820.06,4007.5
NetC3_2: C3.2 U1.2 | length 73
  Component Side w10: C3.2@2764.94,4007.5 2765.63,4006.82 U1.2@2765.63,3934.78
NetC4_2: C4.2 U2.3 | length 154.4
  Component Side w10: U2.3@3375,3797.28 3375,3844.47 3383.62,3853.09 3383.62,3906.12 3395,3917.5 C4.2@3420.86,3917.5
NetC5_1: C5.1 R4.1 R6.2 U2.4 | length 222.7
  Component Side w10: R6.2@3246.76,3795.12 3248.92,3797.28 U2.4@3325,3797.28 3325,3840.53 3337.13,3852.66 3337.13,3869.51 C5.1@3345.06,3877.44 R4.1@3345.06,3932.56
NetC5_2: C5.2 C11.2 C13.2 F2.1 L2.2 R4.2 | length 768.7
  Component Side w10: C5.2@3289.94,3877.44 R4.2@3289.94,3932.56 3291.94,3934.56 3291.94,3959.42 3295.8,3963.28 3521.88,3963.28 3607.72,3877.44 3781.79,3877.44 3799.62,3859.61 3799.62,3725.97
NetC6_1: C6.1 L2.1 U2.1 | length 68.5
  Component Side w10: U2.1@3475,3797.28 3475,3863.09 C6.1@3476.91,3865
NetC6_2: C6.2 U2.2 | length 69
  Component Side w10: C6.2@3421.8,3865 3425,3861.8 U2.2@3425,3797.28
NetC15_2: C15.2 U4.3 | length 158.9
  Component Side w10: U4.3@2723.94,3162.28 2723.94,3196.9 2739.84,3212.8 2739.84,3273.23 2751.61,3285 C15.2@2776.38,3285
NetC16_1: C16.1 R8.1 R10.2 U4.4 | length 210.5
  Component Side w10: R10.2@2608.75,3162.56 2609.02,3162.28 U4.4@2673.94,3162.28 2673.94,3192.88 2701.5,3220.44 C16.1@2701.5,3235 ; C16.1@2703.78,3245.21 R8.1@2703.78,3297.49 R8.1@2703.78,3306.25
NetC16_2: C16.2 C22.2 C25.2 F3.1 L3.2 R8.2 | length 634.5
  Component Side w10: C16.2@2646.38,3235 2646.38,3297.49 2646.38,3328.42 2657.42,3339.45 3000.98,3339.45 3029.52,3310.91 v1(3171.07,3310.91)
  other v1: 3171.07,3219.57 3215,3219.57 3852.82,3225.65 3896.75,3225.65 3171.07,3265 3215,3265 3852.82,3271.08 3896.75,3271.08 3215,3310.91 3852.82,3316.99 3896.75,3316.99
NetC17_2: C17.2 U5.3 | length 149.5
  Component Side w10: U5.3@3370,3122.28 3370,3160 3380,3170 3380,3223.26 3396.74,3240 C17.2@3417.44,3240